# Altium PCB MB1137.PcbDoc (part 1 of 4)
Units mm, origin at the board's own origin, x right, y up, seen from the top; angles counter-clockwise.
Board outline 70.13 x 133.47 mm, 6 copper layers (Top Layer, GND, Signal, PWR, GND (Mid2), Bottom Layer), stack 1.893 mm thick; 293 components, 281 nets, 1134 pads, 921 vias.
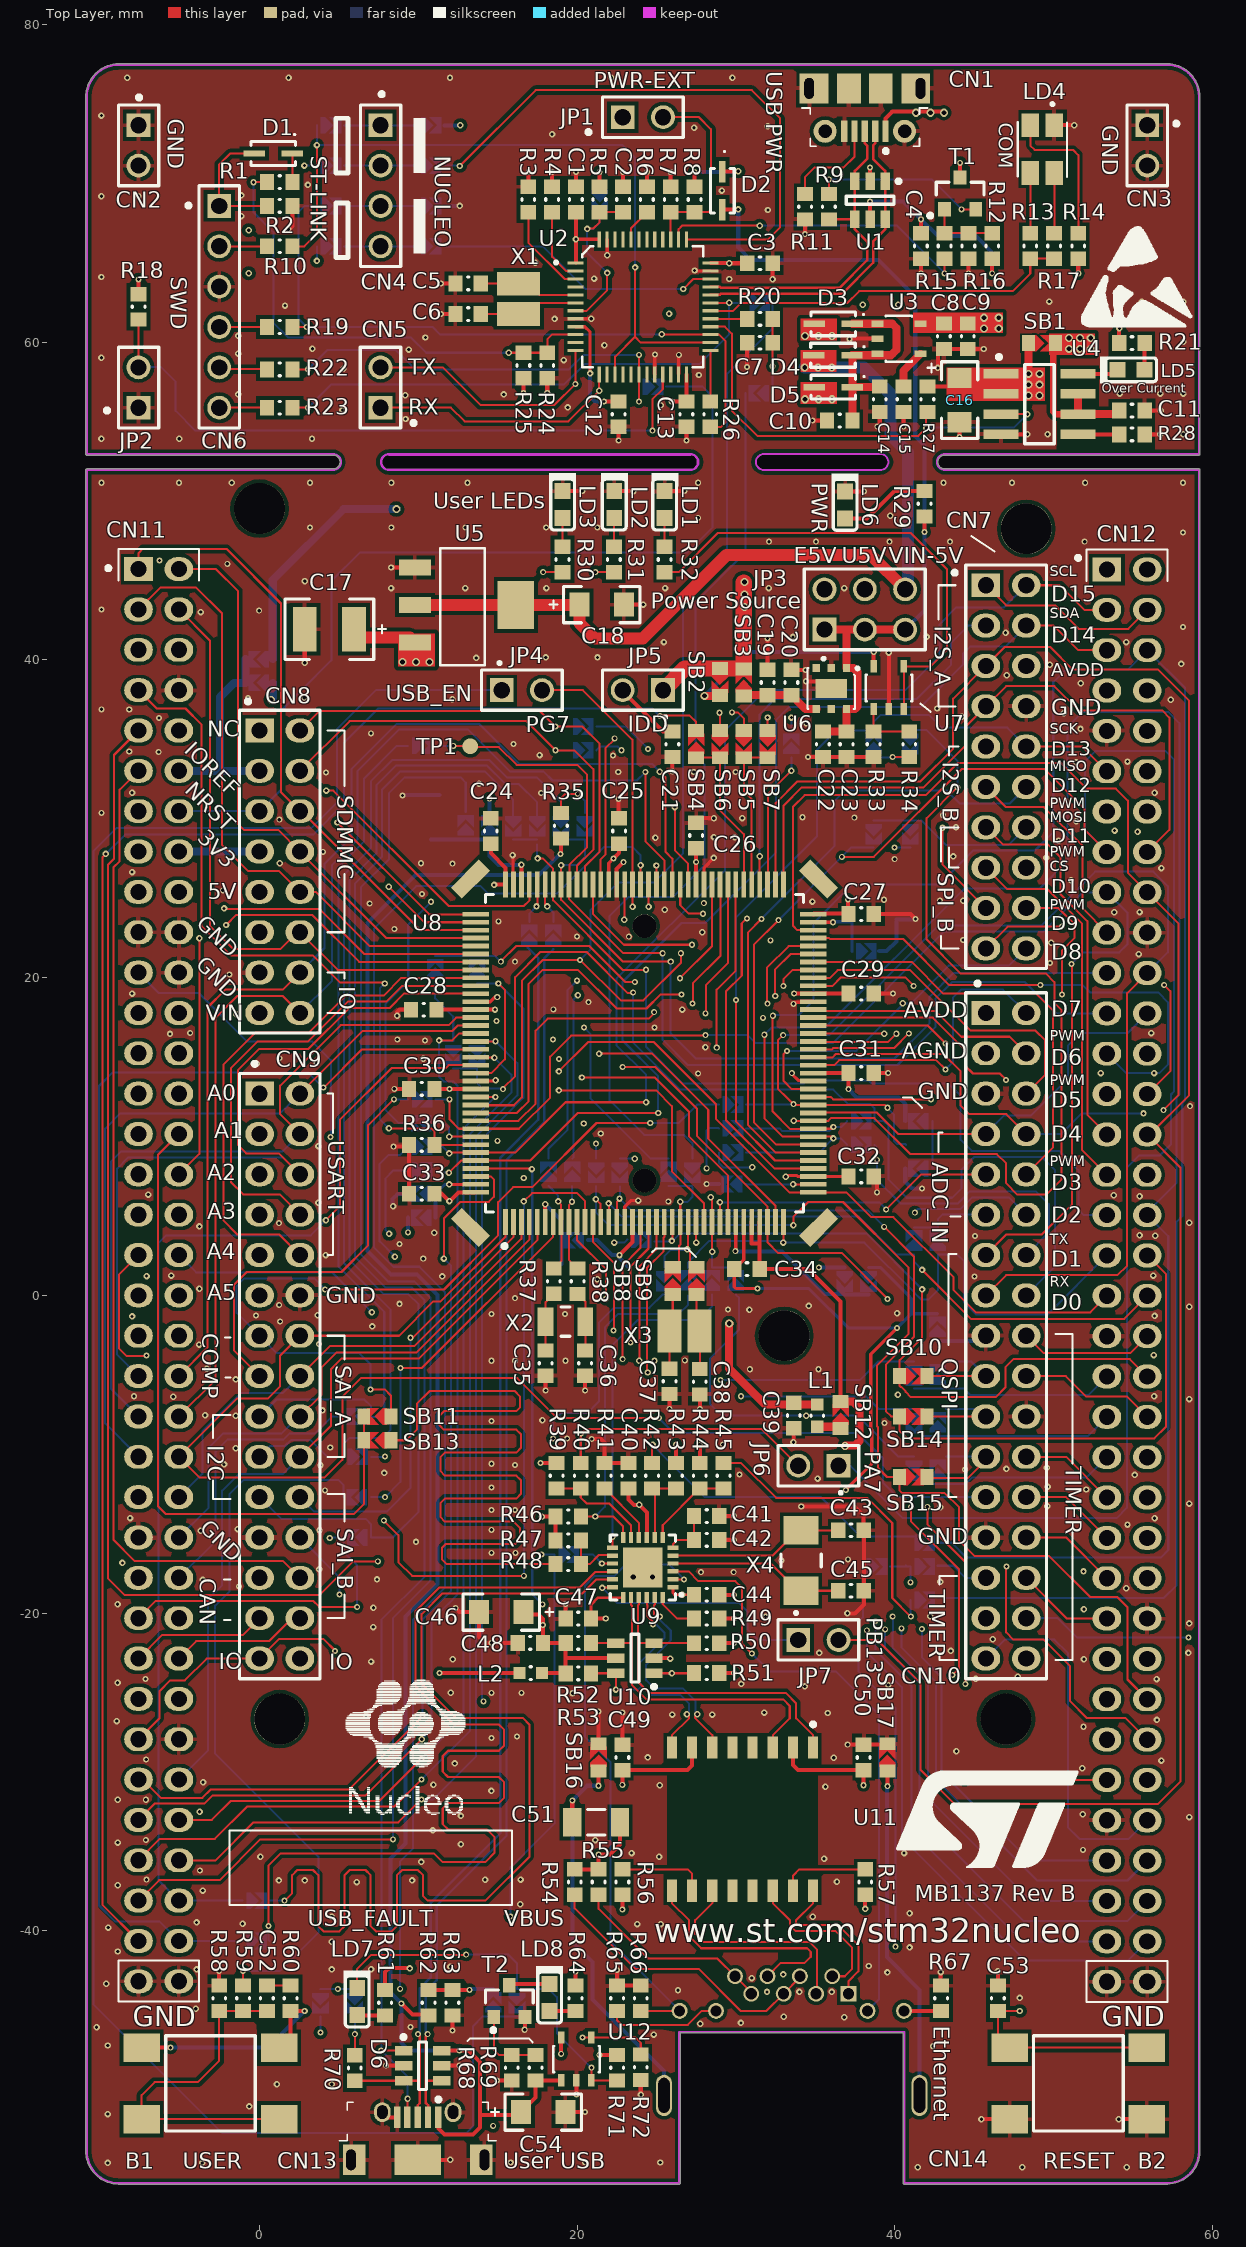
[diagram p0: Top Layer view]
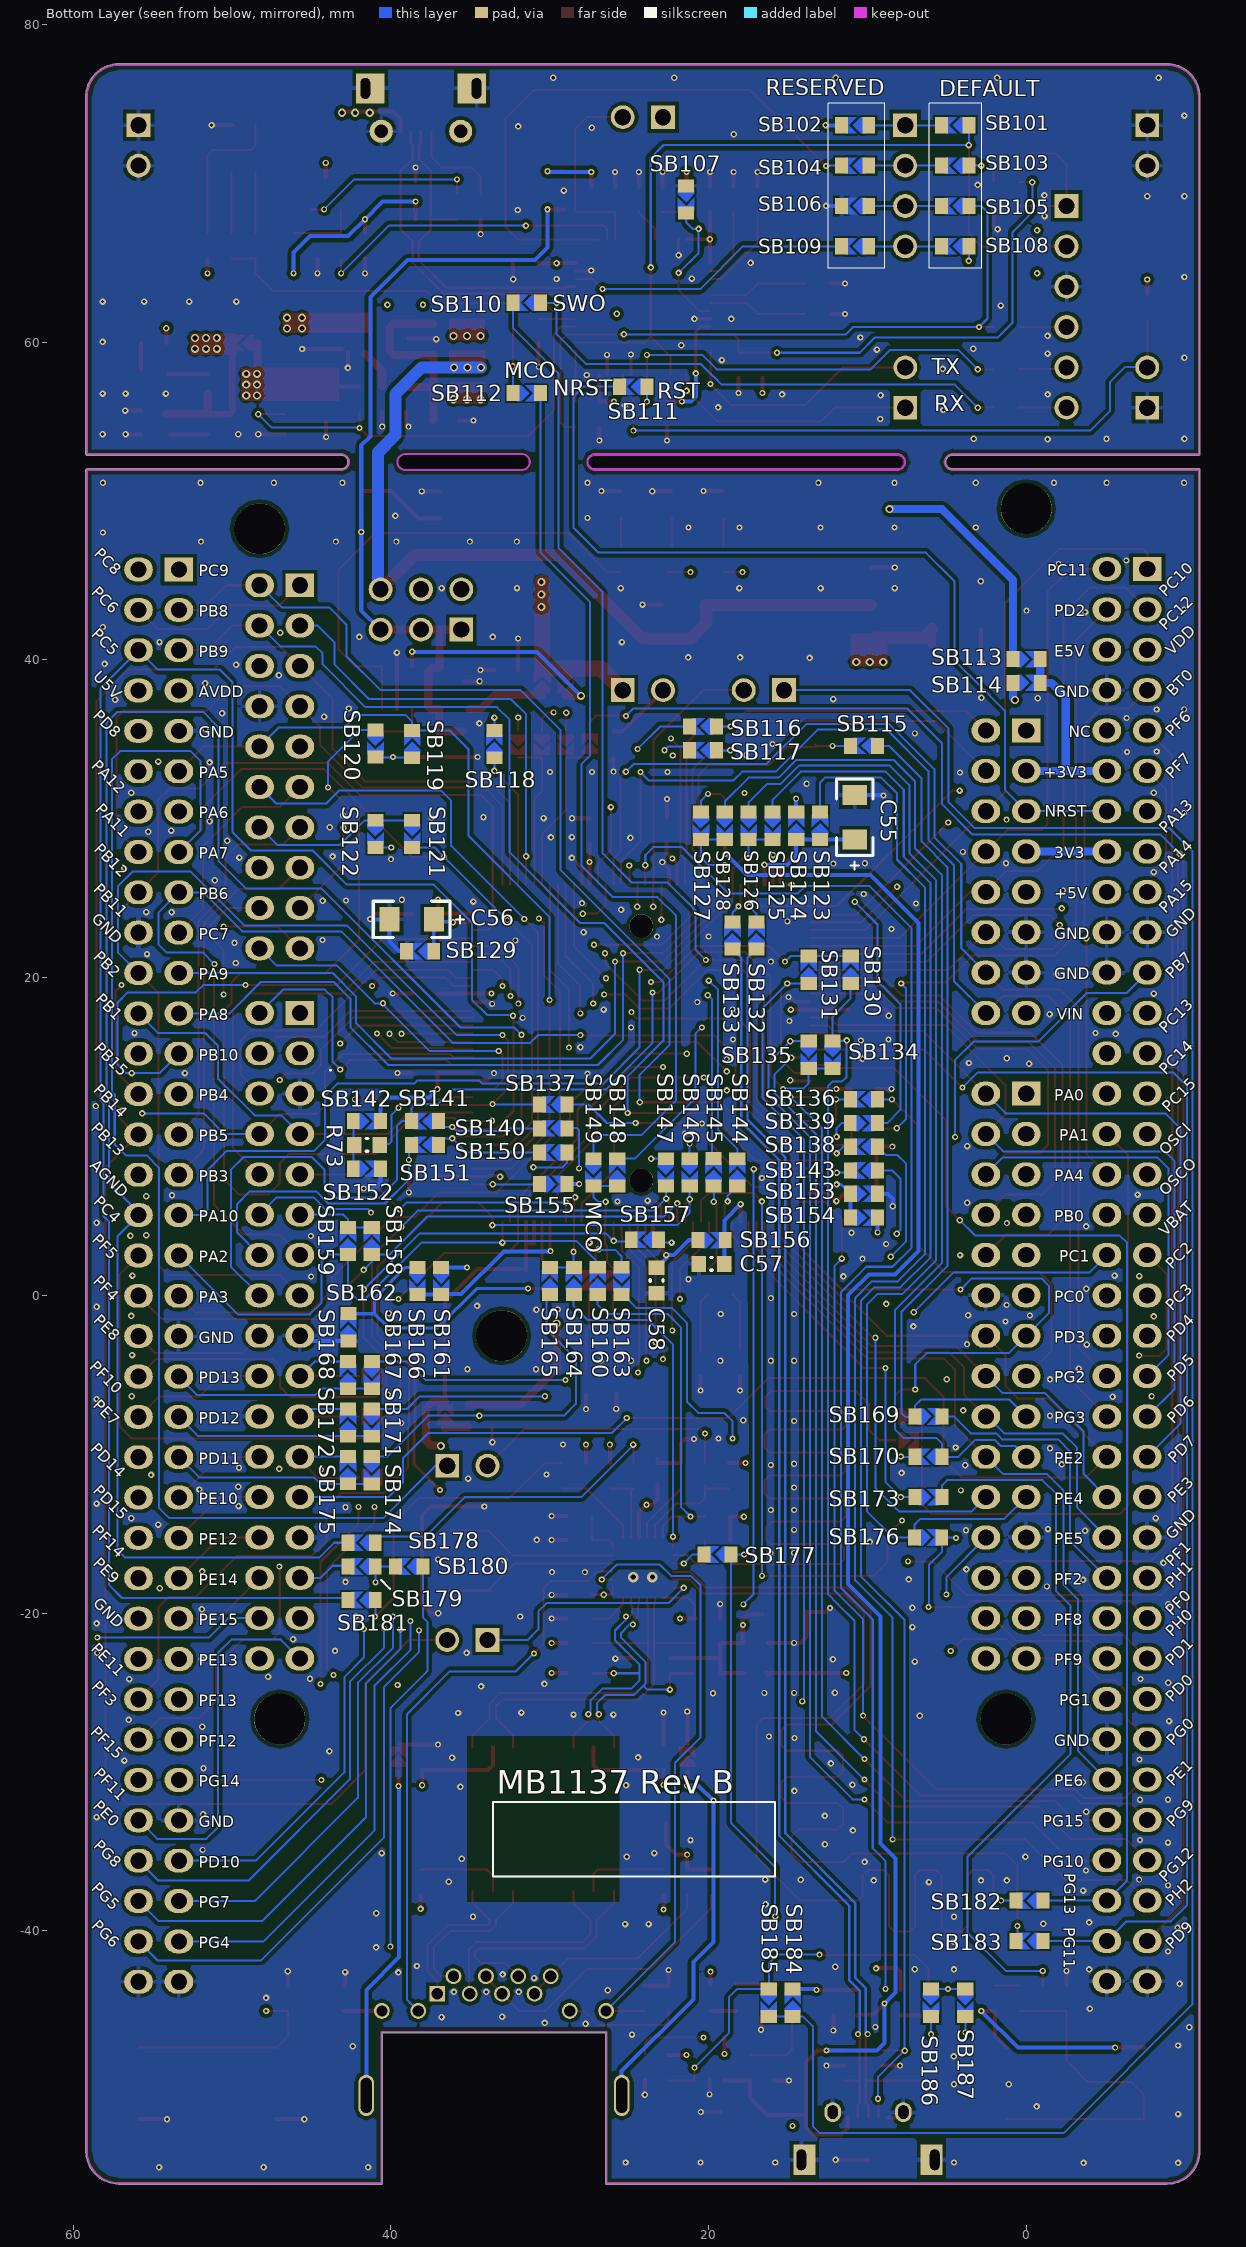
[diagram p1: Bottom Layer view, seen from below]
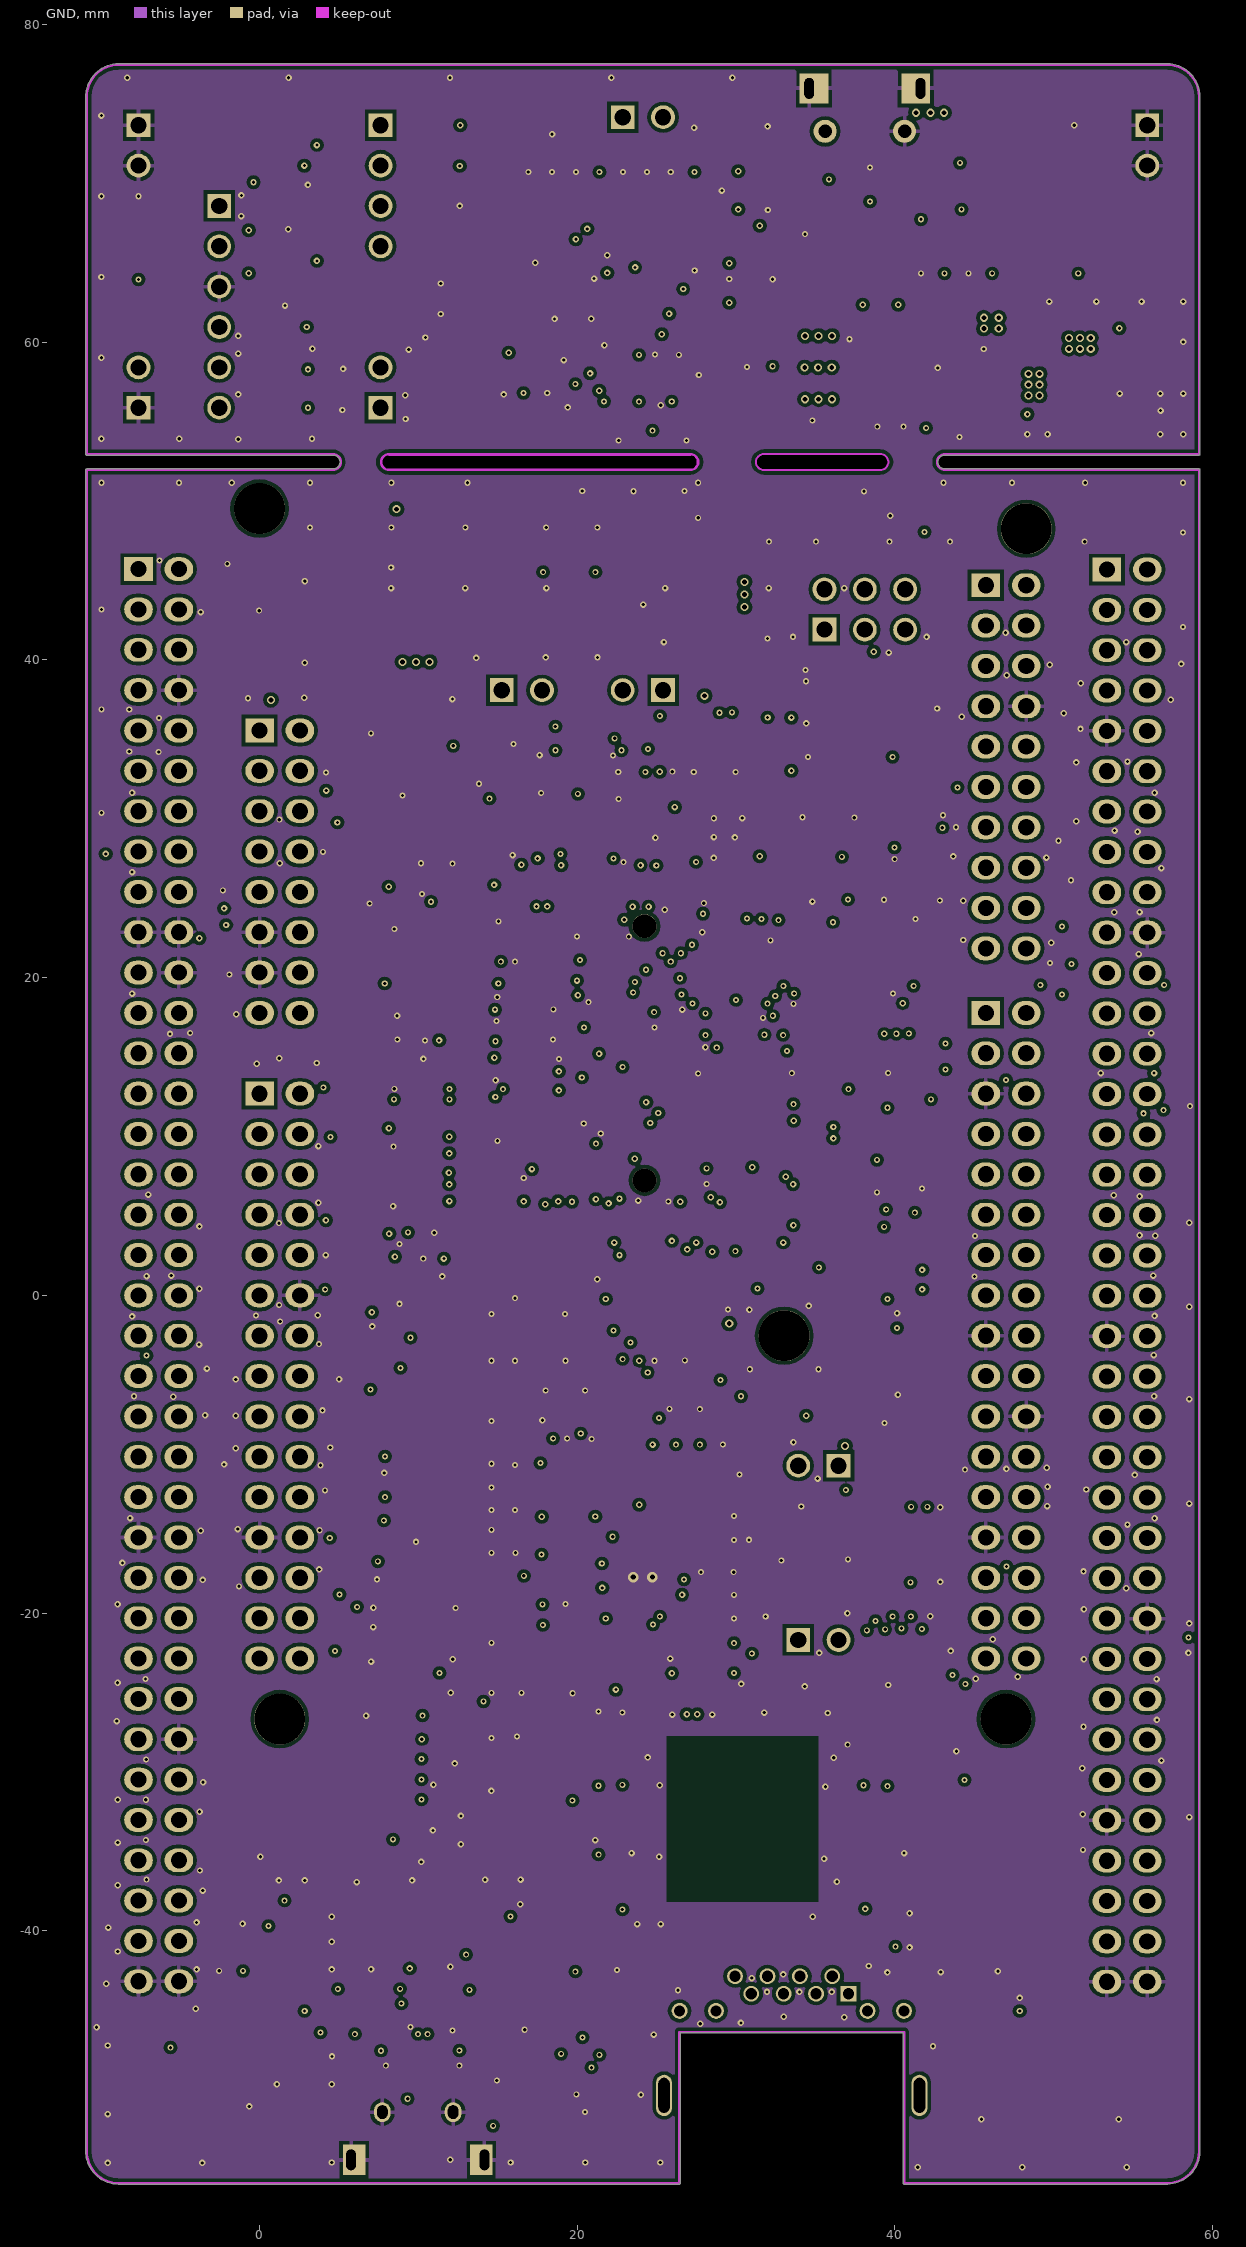
[diagram p2: GND]
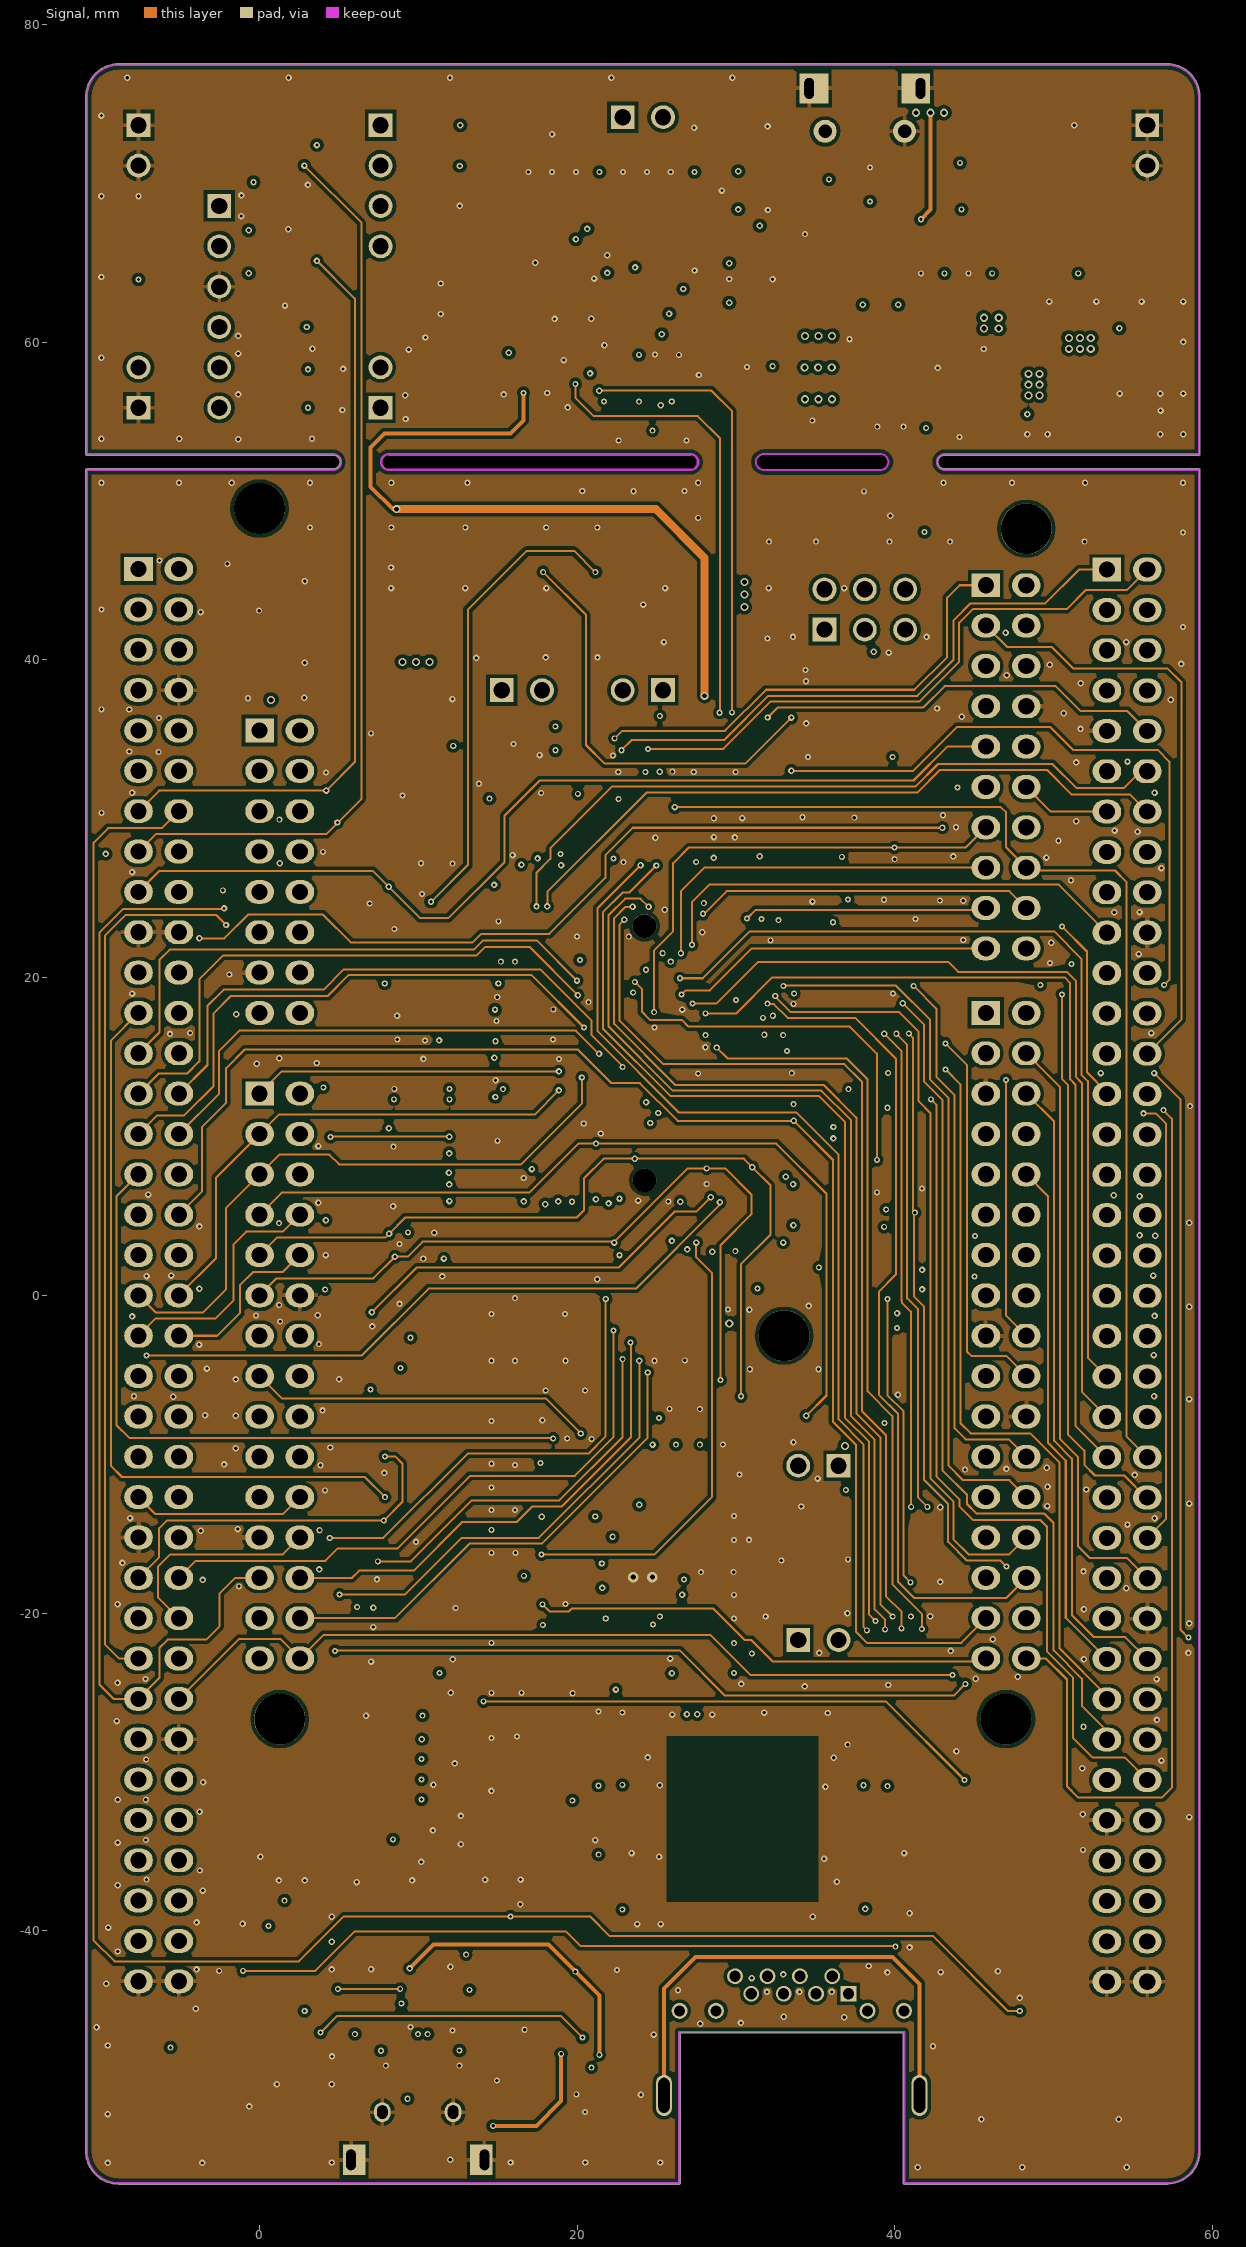
[diagram p3: Signal]
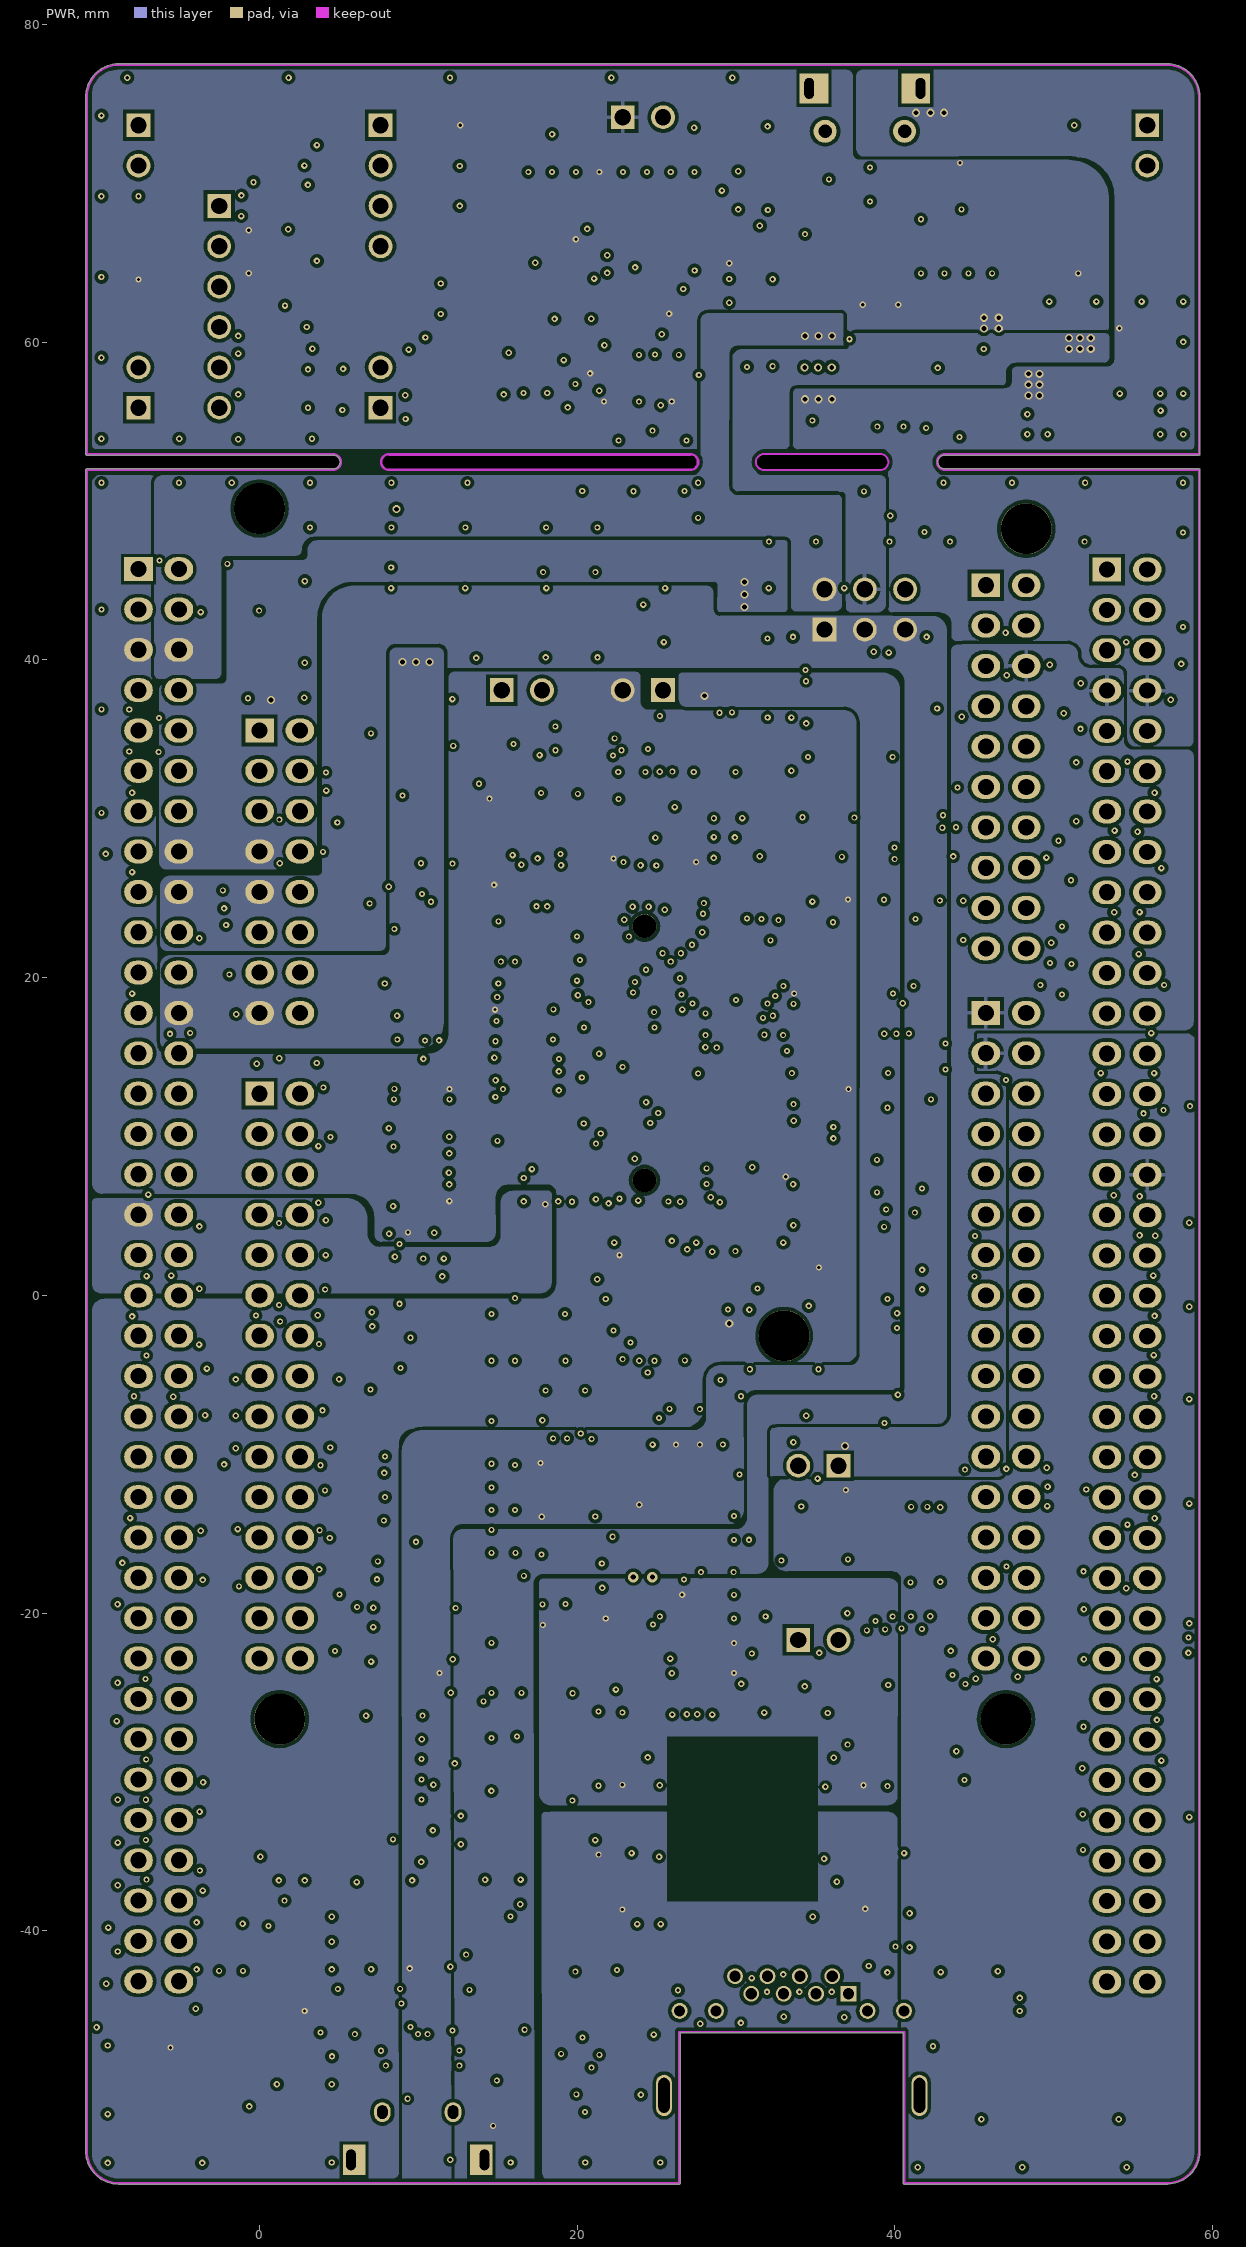
[diagram p4: PWR]
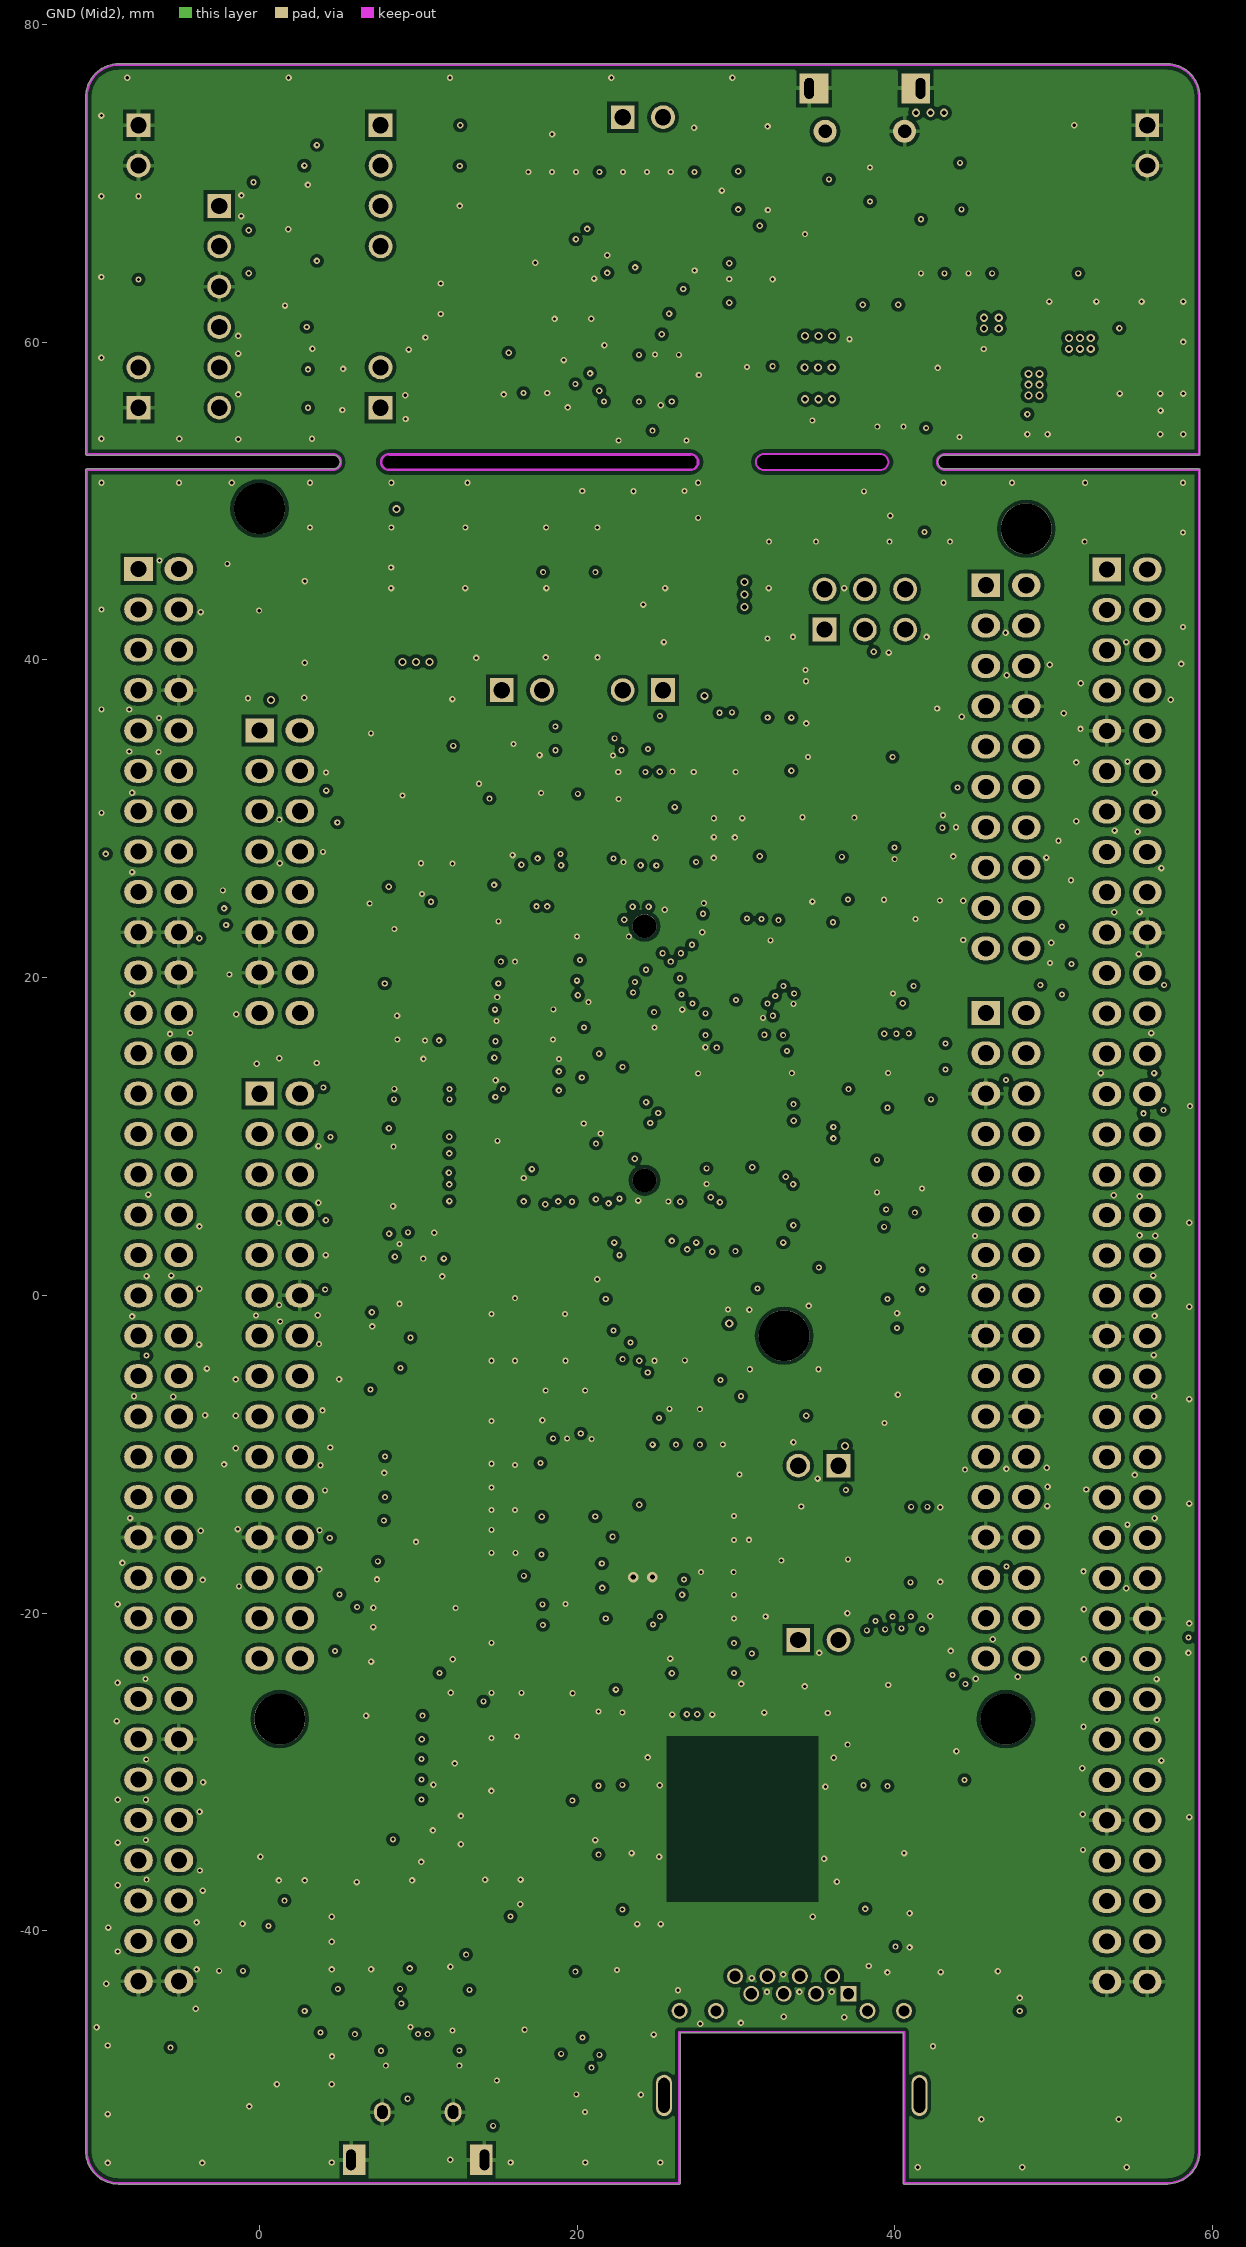
[diagram p5: GND (Mid2)]

## Layer stack, top to bottom
Top Solder: solder mask 0.0102, Solder Resist, Dk 3.5
Top Layer: signal copper 0.0356
Dielectric1: core 0.4, FR-4, Dk 4.8
GND: signal copper 0.0356
Dielectric2: prepreg 0.24, FR-4, Dk 4.8
Signal: signal copper 0.0356
Dielectric4: core 0.32, FR-4, Dk 4.8
PWR: signal copper 0.0356
Dielectric5: prepreg 0.32, FR-4, Dk 4.8
GND (Mid2): signal copper 0.0356
Dielectric3: core 0.4, FR-4, Dk 4.8
Bottom Layer: signal copper 0.0356
Bottom Solder: solder mask 0.0102, Solder Resist, Dk 3.5

## Board outline
-10.934,-53.88 ccw(c-8.87,-53.88) -8.886,-55.944 ccw(c-8.874,-55.881) -8.874,-55.945 26.416,-55.945 ccw(c26.416,-55.881) 26.48,-55.881 26.48,-46.423 40.525,-46.423 40.525,-55.881 ccw(c40.589,-55.881) 40.589,-55.945 57.126,-55.945 ccw(c57.126,-55.881) 57.152,-55.94 ccw(c57.126,-53.876) 59.19,-53.902 ccw(c59.13,-53.88) 59.194,-53.88 59.194,51.96 ccw(c59.13,51.96) 59.13,52.024 43.13,52.024 cw(c43.13,51.96) 43.131,52.024 43.13,52.024 cw(c43.13,52.46) 43.13,52.896 59.129,52.896 ccw(c59.13,52.96) 59.194,52.96 59.194,75.46 ccw(c59.13,75.46) 59.194,75.461 cw(c57.13,75.46) 59.194,75.46 59.194,75.461 ccw(c57.13,75.46) 57.131,77.524 ccw(c57.13,75.46) 57.13,77.524 cw(c57.13,77.46) 57.131,77.524 57.13,77.524 -8.87,77.524 ccw(c-8.87,77.46) -8.871,77.524 cw(c-8.87,75.46) -8.87,77.524 -8.871,77.524 ccw(c-8.87,75.46) -10.934,75.46 -10.934,52.96 ccw(c-10.87,52.96) -10.87,52.896 4.63,52.896 cw(c4.63,52.96) 4.629,52.896 4.63,52.896 cw(c4.63,52.46) 5.066,52.46 cw(c4.63,52.46) 4.63,52.024 -10.87,52.024 ccw(c-10.87,51.96) -10.934,51.96
cut-out: 8.13,52.024 8.131,52.024 14.463,52.024 27.13,52.024 cw(c27.13,51.96) 27.131,52.024 ccw(c27.13,52.46) 27.566,52.46 ccw(c27.13,52.46) 27.13,52.896 cw(c27.13,52.96) 27.129,52.896 27.13,52.896 14.463,52.896 27.129,52.896 14.463,52.896 8.13,52.896 ccw(c8.13,52.96) 8.131,52.896 8.13,52.896 14.463,52.896 8.13,52.896 ccw(c8.13,52.46)
cut-out: 31.75,51.96 cw(c31.75,52.46) 31.75,52.96 39.08,52.96 cw(c39.08,52.46) 39.08,51.96

## Design rules (kind name [scope] priority, off if disabled: settings)
Clearance "U9 PWR TRACK" [(ObjectKind = 'Track') vs (ObjectKind = 'Pad') And (Component = 'U9')] p1: gap=0.203 ignorepadtopadclearanceinfootprint=FALSE
Clearance "U8 PWR TRACK" [(ObjectKind = 'Track') vs (ObjectKind = 'Pad') And (Component = 'U8')] p2: gap=0.203 ignorepadtopadclearanceinfootprint=FALSE
Clearance SB [(HasFootprint('SB_0603')) or (HasFootprint('JP2_SMD'))] p3: gap=0.127 ignorepadtopadclearanceinfootprint=FALSE
Clearance CN1_PAD [(ObjectKind = 'Pad') And (Component = 'CN1') vs (ObjectKind = 'Pad') And (Component = 'CN1')] p4: gap=0.203 ignorepadtopadclearanceinfootprint=FALSE
Clearance U6_PAD [(ObjectKind = 'Pad') And (Component = 'D6') vs (ObjectKind = 'Pad') And (Component = 'D6')] p5: gap=0.203 ignorepadtopadclearanceinfootprint=FALSE
Clearance CN13_PAD [(ObjectKind = 'Pad') And (Component = 'CN13') vs (ObjectKind = 'Pad') And (Component = 'CN13')] p6: gap=0.178 ignorepadtopadclearanceinfootprint=FALSE
Clearance U9_PAD [(ObjectKind = 'Pad') And (Component = 'U9') vs (ObjectKind = 'Pad') And (Component = 'U9')] p7: gap=0.203 ignorepadtopadclearanceinfootprint=FALSE
Clearance U8_PAD [(ObjectKind = 'Pad') And (Component = 'U8') vs (ObjectKind = 'Pad') And (Component = 'U8')] p8: gap=0.198 ignorepadtopadclearanceinfootprint=FALSE
Clearance Polygon [(ObjectKind = 'Poly')] p9: gap=0.254 ignorepadtopadclearanceinfootprint=FALSE
Clearance [All] p10: gap=0.226 ignorepadtopadclearanceinfootprint=FALSE
DiffPairsRouting [All] p1: maxlimit=0.254 minlimit=0.226 mostfreqgap=0.226 toplayer_minwidth=0.381 toplayer_maxwidth=0.381 toplayer_prefwidth=0.381 midlayer1_minwidth=0.381 midlayer1_maxwidth=0.381 midlayer1_prefwidth=0.381 midlayer2_minwidth=0.381 midlayer2_maxwidth=0.381 midlayer2_prefwidth=0.381 midlayer3_minwidth=0.381 midlayer3_maxwidth=0.381 midlayer3_prefwidth=0.381 midlayer4_minwidth=0.381 midlayer4_maxwidth=0.381 midlayer4_prefwidth=0.381 bottomlayer_minwidth=0.381 bottomlayer_maxwidth=0.381 bottomlayer_prefwidth=0.381 maxuncoupledlength=12.7
FabricationTestPointUsage TestPointUsage [All] p1: valid=0 allowmultiple=FALSE
FabricationTestpoint Testpoint [(IsPad And (OnTopLayer Or OnBottomLayer))] p1: side=3 testpointundercomponent=TRUE minsize=1.016 maxsize=2.54 preferedsize=1.524 minholesize=0 maxholesize=1.016 preferedholesize=0.813 testpointgrid=0.025 allowsidetop=TRUE allowsidebottom=TRUE usegrid=TRUE gridtolerance=0
HoleSize [All] p1: absolutevalues=TRUE maxlimit=3.81 minlimit=0.025 maxpercent=80.000 minpercent=20.000
MatchedLengths "Schematic Matched Net Lengths_3" [InNet('TD_P')] p1: tolerance=2.54 checknetsindiffpair=TRUE checkdiffpairvsdiffpair=FALSE checkxsignals=FALSE checkothers=FALSE
MatchedLengths "Schematic Matched Net Lengths_2" [InNet('TD_N')] p2: tolerance=2.54 checknetsindiffpair=TRUE checkdiffpairvsdiffpair=FALSE checkxsignals=FALSE checkothers=FALSE
MatchedLengths "Schematic Matched Net Lengths_1" [InNet('RD_P')] p3: tolerance=2.54 checknetsindiffpair=TRUE checkdiffpairvsdiffpair=FALSE checkxsignals=FALSE checkothers=FALSE
MatchedLengths "Schematic Matched Net Lengths" [InNet('RD_N')] p4: tolerance=2.54 checknetsindiffpair=TRUE checkdiffpairvsdiffpair=FALSE checkxsignals=FALSE checkothers=FALSE
MinimumSolderMaskSliver [All] p1: minsoldermaskwidth=0.013
PolygonConnect VBAT [(ObjectKind = 'Poly') And (Net = 'VBAT')] p1: connectstyle=Direct reliefconductorwidth=0.254 reliefentries=4 polygonreliefangle="90 Angle" airgapwidth=0.254
PolygonConnect VDD [(ObjectKind = 'Poly') And (Net = 'VDD')] p2: connectstyle=Direct reliefconductorwidth=0.254 reliefentries=4 polygonreliefangle="90 Angle" airgapwidth=0.254
PolygonConnect VIN [(ObjectKind = 'Poly') And (Net = 'VIN')] p3: connectstyle=Direct reliefconductorwidth=0.254 reliefentries=4 polygonreliefangle="90 Angle" airgapwidth=0.254
PolygonConnect +3V3 [(ObjectKind = 'Poly') And (Net = '+3V3')] p4: connectstyle=Direct reliefconductorwidth=0.254 reliefentries=4 polygonreliefangle="90 Angle" airgapwidth=0.254
PolygonConnect E5V [(ObjectKind = 'Poly') And (Net = 'E5V')] p5: connectstyle=Direct reliefconductorwidth=0.254 reliefentries=4 polygonreliefangle="90 Angle" airgapwidth=0.254
PolygonConnect +5V [(ObjectKind = 'Poly') And (Net = '+5V')] p6: connectstyle=Direct reliefconductorwidth=0.254 reliefentries=4 polygonreliefangle="90 Angle" airgapwidth=0.254
PolygonConnect U5V [(ObjectKind = 'Poly') And (Net = 'NetC17_2')] p7: connectstyle=Direct reliefconductorwidth=0.254 reliefentries=4 polygonreliefangle="90 Angle" airgapwidth=0.254
PolygonConnect VIA [IsVia] p8: connectstyle=Direct reliefconductorwidth=0.508 reliefentries=4 polygonreliefangle="90 Angle" airgapwidth=0.254
PolygonConnect [All] p9: connectstyle=Relief reliefconductorwidth=0.254 reliefentries=4 polygonreliefangle="90 Angle" airgapwidth=0.254
RoutingLayers [All] p1: top layer_v5=FALSE mid layer 1_v5=FALSE mid layer 2_v5=FALSE mid layer 3_v5=FALSE mid layer 4_v5=FALSE bottom layer_v5=FALSE
RoutingVias [All] p1: holewidth=0.305 width=0.508 viastyle="Through Hole" minholewidth=0.203 minwidth=0.381 maxholewidth=0.711 maxwidth=1.27
SilkToSilkClearance [All] p1: silktosilkclearance=0.102
SilkToSolderMaskClearance SilkscreenOverComponentPads [IsPad] p1: minsilkscreentomaskgap=0.102 clearancetoexposedcopper=TRUE
SolderMaskExpansion [All] p1: expansion=0.102 istentingtop=FALSE
Width PWR [InNetClass('PWR')] p1: maxlimit=2.54 minlimit=0.203 preferedwidth=0.254 midlayer1_minwidth=0.254 midlayer2_minwidth=0.254 midlayer3_minwidth=0.254 midlayer4_minwidth=0.254 bottomlayer_minwidth=0.254 minimp=50.000000 maximp=50.000000 favimp=50.000000
Width [All] p2: maxlimit=2.54 minlimit=0.127 preferedwidth=0.127 minimp=50.000000 maximp=50.000000 favimp=50.000000
22 further rules are at their usual default settings.

## Classes and differential pairs
component class U_USB: C54 CN13 D6 LD7 LD8 R61 R62 R63 R64 R68 R69 R70 R71 R72 R76 SB184 SB185 SB186 SB187 T2 U12
component class U_Ethernet: C40 C41 C42 C43 C44 C45 C46 C47 C48 C49 C50 C51 CN14 L2 R39 R40 R41 R42 R43 R44 R45 R46 R47 R48 R49 R50 R51 R52 R53 R54 R55 R56 R57 R65 R66 R67 SB16 SB17 SB177 U9 U10 U11 X4
component class U_MCU_144: B1 B2 C21 C24 C25 C26 C27 C28 C29 C30 C31 C32 C33 C34 C35 C36 C37 C38 C39 C52 C53 C55 C56 C57 C58 JP4 JP6 JP7 L1 LD2 LD3 R30 R31 R35 R36 R37 R38 R58 R59 R60 R73 SB5 SB6 SB8 SB9 SB12 SB13 SB118 SB123 SB124 SB125 SB127 SB129 SB132 SB133 SB139 SB142 SB149 SB152 SB153 SB154 SB155 SB156 SB160 SB161 SB162 SB164 SB166 SB173 SB178 SB180 SB181 SB182 SB183 TP1 U8 X2 X3
component class MB1137: C11 C16 C17 C18 C19 C20 C22 C23 JP3 JP5 LD5 LD6 R21 R27 R28 R29 SB1 SB2 SB3 U4 U5 U6
net class PH[0..2]: PH0 PH1 PH2
net class PG[0..15]: PG0 PG1 PG2 PG3 PG4 PG5 PG6 PG7 PG8 PG9 PG10 PG11 PG12 PG13 PG14 PG15
net class PF[0..15]: PF0 PF1 PF2 PF3 PF4 PF5 PF6 PF7 PF8 PF9 PF10 PF11 PF12 PF13 PF14 PF15
net class PE[0..15]: PE0 PE1 PE2 PE3 PE4 PE5 PE6 PE7 PE8 PE9 PE10 PE11 PE12 PE13 PE14 PE15
net class PD[0..15]: PD0 PD1 PD2 PD3 PD4 PD5 PD6 PD7 PD8 PD9 PD10 PD11 PD12 PD13 PD14 PD15
net class PA[0..15]: PA0 PA1 PA2 PA3 PA4 PA5 PA6 PA7 PA8 PA9 PA10 PA11 PA12 PA13 PA14 PA15
net class PB[0..15]: PB0 PB1 PB2 PB3 PB4 PB5 PB6 PB7 PB8 PB9 PB10 PB11 PB12 PB13 PB14 PB15
net class PC[0..15]: PC0 PC1 PC2 PC3 PC4 PC5 PC6 PC7 PC8 PC9 PC10 PC11 PC12 PC13 PC14 PC15
component class U_ST_LINK_V2-1: C1 C2 C3 C4 C5 C6 C7 C8 C9 C10 C12 C13 C14 C15 CN1 CN2 CN3 CN4 CN5 CN6 D1 D2 D3 D4 D5 JP1 JP2 LD4 R1 R2 R3 R4 R5 R6 R7 R8 R9 R10 R11 R12 R13 R14 R15 R16 R17 R18 R19 R20 R22 R23 R24 R25 R26 SB101 SB102 SB103 SB104 SB105 SB106 SB107 SB108 SB109 SB110 SB111 SB112 T1 U1 U2 U3 X1
component class U_Connectors: CN7 CN8 CN9 CN10 CN11 CN12 LD1 R32 R33 R34 SB4 SB7 SB10 SB11 SB14 SB15 SB113 SB114 SB115 SB116 SB117 SB119 SB120 SB121 SB122 SB126 SB128 SB130 SB131 SB134 SB135 SB136 SB137 SB138 SB140 SB141 SB143 SB144 SB145 SB146 SB147 SB148 SB150 SB151 SB157 SB158 SB159 SB163 SB165 SB167 SB168 SB169 SB170 SB171 SB172 SB174 SB175 SB176 SB179 U7
differential pair TD: +TD_P -TD_N
differential pair RD: +RD_P -RD_N
differential pair NewDifferentialPair1: +NetCN13_3 -NetCN12_2
differential pair NewDifferentialPair2: +NetCN13_2 -NetCN13_3

## Components (designator, comment, footprint, x,y, rotation, side; value= is the part's Value field where it differs from the comment)
B1 "USER (Blue)" PB-6X6mm-Blue -3.099,-49.606 r180 top
B2 "TD-0341 [RESET/Black]" PB-6X6mm-Black 51.537,-49.606 r180 top
C1 "100nF" 0603C 19.914,68.986 r270 top
C2 "100nF" 0603C 22.885,68.986 r270 top
C3 "100nF" 0603C 31.496,64.973 r180 top
C4 "100nF" 0603C 41.631,66.065 r90 top
C5 "10pF" 0603C 13.132,63.703 r180 top
C6 "10pF" 0603C 13.132,61.773 r180 top
C7 "20pF[N/A]" 0603C 31.496,59.969 r180 top
C8 "100nF" 0603C 43.078,60.376 r90 top locked
C9 "1uF_X5R_0603" 0603C 44.577,60.376 r270 top
C10 "100nF" 0603C 36.525,55.067 r0 top
C11 "100nF" 0603C 54.915,55.702 r180 top
C12 "100nF" 0603C 22.606,55.474 r90 top
C13 "100nF" 0603C 26.873,55.474 r90 top
C14 "1uF_X5R_0603" 0603C 39.04,56.413 r90 top
C15 "10nF_X7R_0603" 0603C 40.538,56.413 r90 top
C16 "4.7uF" TAN-A 44.069,56.363 r90 top
C17 "10uF(25V)" TAN-B 4.394,41.935 r0 top
C18 "10uF" TAN-A 21.539,43.485 r180 top
C19 "100nF" 0603C 31.979,38.583 r270 top
C20 "1uF_X5R_0603" 0603C 33.477,38.583 r90 top
C21 "4.7uF_X5R_0603" 0603C 25.984,34.696 r270 top
C22 "100nF" 0603C 35.458,34.696 r90 top
C23 "1uF_X5R_0603" 0603C 36.957,34.696 r270 top
C24 "100nF" 0603C 14.554,29.235 r90 top
C25 "100nF" 0603C 22.631,29.235 r90 top
C26 "100nF" 0603C 27.483,28.956 r90 top
C27 "100nF" 0603C 37.871,24.003 r0 top
C28 "100nF" 0603C 10.338,17.983 r180 top
C29 "100nF" 0603C 37.871,18.999 r0 top
C30 "100nF" 0603C 10.211,13.005 r180 top
C31 "100nF" 0603C 37.871,13.995 r0 top
C32 "100nF" 0603C 37.871,7.493 r0 top
C33 "100nF" 0603C 10.211,6.401 r180 top
C34 "100nF" 0603C 30.683,1.651 r180 top
C35 "2pF" 0603C 18.009,-4.267 r270 top
C36 "2pF" 0603C 20.498,-4.267 r270 top
C37 "4.3pF[N/A]" 0603C 25.806,-5.41 r270 top
C38 "4.3pF[N/A]" 0603C 27.711,-5.436 r270 top
C39 "100nF" 0603C 33.63,-7.554 r270 top
C40 "100nF" 0603C 23.216,-11.354 r270 top
C41 "1uF_X5R_0603" 0603C 28.143,-13.894 r0 top
C42 "470pF" 0603C 28.143,-15.392 r180 top
C43 "30pF" 0603C 37.236,-14.783 r0 top
C44 "100nF" 0603C 28.143,-18.847 r180 top
C45 "30pF" 0603C 37.236,-18.593 r0 top
C46 "10uF" TAN-A 15.215,-19.939 r0 top
C47 "100nF" 0603C 20.066,-20.345 r0 top
C48 "100nF" 0603C 17.043,-21.869 r0 top
C49 "100nF" 0603C 22.835,-29.083 r270 top
C50 "100nF" 0603C 38.024,-29.083 r270 top
C51 "TC1206KKX7RDBB102" 1206C 21.184,-33.172 r0 top
C52 "[N/A]" 0603C 0.457,-44.247 r270 top
C53 "100nF" 0603C 46.482,-44.247 r270 top
C54 "4.7uF" TAN-A 17.856,-51.41 r180 top
C55 "2.2uF_X7R" TAN-A 10.795,30.099 r270 bottom
C56 "2.2uF_X7R" TAN-A 38.684,23.673 r180 bottom
C57 "1uF_X5R_0603" 0603C 19.804,1.981 r0 bottom
C58 "100nF" 0603C 23.266,0.94 r270 bottom
CN1 "1050170001" Molex_1050170001 38.1,73.279 r180 top locked
CN2 "" HDR_1x2_2R54_V_M -7.62,73.66 r270 top locked
CN3 "" HDR_1x2_2R54_V_M 55.88,73.66 r270 top locked
CN4 "Header 4" HDR_1x4_2R54_V_M 7.62,73.66 r270 top locked
CN5 "" HDR_1x2_2R54_V_M_S 7.612,55.88 r90 top locked
CN6 "Header 6X1" HDR_1x6_2R54_V_M -2.54,68.58 r270 top locked
CN7 "Header 10X2_Female" HDR_10x2_2R54_V_F 45.72,44.704 r270 top locked
CN8 "Header 8X2_Female" HDR_8x2_2R54_V_F 0,35.56 r270 top locked
CN9 "Header 15X2_Female" HDR_15x2_2R54_V_F 0,12.7 r270 top locked
CN10 "Header 17X2_Female" HDR_17x2_2R54_V_F 45.72,17.78 r270 top locked
CN11 "Header 36X2" HDR_2x36_2R54_V_M -7.62,45.72 r270 top locked
CN12 "Header 36X2" HDR_2x36_2R54_V_M 53.34,45.695 r270 top locked
CN13 "475900001" MOLEX_47590001 9.957,-51.74 r0 top locked
CN14 "KRJ-CB4.2GYZNL" RJ45_KRJ-CB4.2GYZNL 33.503,-46.609 r0 top locked
D1 "BAT60JFILM" SOD-323 0.864,71.882 r0 top
D2 "BAT60JFILM" SOD-323 29.134,69.545 r90 top
D3 "BAT60JFILM" SOD-323 36.119,61.163 r0 top
D4 "BAT60JFILM" SOD-323 36.093,59.182 r0 top
D5 "BAT60JFILM" SOD-323 36.119,57.175 r0 top
D6 "ESDA6V1BC6" SOT23-6L 10.262,-48.489 r0 top
JP1 "" HDR_1x2_2R54_V_M_S 22.86,74.168 r0 top locked
JP2 "" HDR_1x2_2R54_V_M_S -7.62,55.88 r90 top locked
JP3 "Header 3X2" HDR_3x2_2R54_V_M 35.56,41.91 r0 top locked
JP4 "" HDR_1x2_2R54_V_M_S 15.24,38.1 r0 top locked
JP5 "" HDR_1x2_2R54_V_M_S 25.4,38.1 r180 top
JP6 "" HDR_1x2_2R54_V_M_S 36.449,-10.719 r180 top
JP7 "" HDR_1x2_2R54_V_M_S 33.909,-21.692 r0 top
L1 "BEAD" 0603L 35.103,-7.569 r90 top
L2 "BEAD" 0603L 17.069,-23.774 r0 top
LD1 "Green" 0603D-G 25.502,49.784 r270 top
LD2 "Blue" 0603D-B 22.327,49.784 r270 top
LD3 "Red" 0603D-R 19.075,49.784 r270 top
LD4 "LD_BICOLOR_CMS" HSMF-A201 49.276,72.161 r270 top
LD5 "Red" 0603D-R 54.864,58.268 r0 top
LD6 "Green" 0603D-G 36.856,49.767 r270 top
LD7 "Red" 0603D-R 6.147,-44.45 r270 top
LD8 "Green" 0603D-G 18.263,-44.196 r270 top
R1 "100[N/A]" 0603R 1.27,70.079 r180 top
R2 "10K" 0603R 1.27,68.58 r0 top
R3 "10K[N/A]" 0603R 16.916,68.986 r270 top
R4 "10K" 0603R 18.415,68.986 r270 top
R5 "100K" 0603R 21.387,68.986 r90 top
R6 "100K" 0603R 24.384,68.986 r270 top
R7 "4K7" 0603R 25.883,68.986 r90 top
R8 "2K7" 0603R 27.381,68.986 r270 top locked
R9 "1K5" 0603R 35.839,68.529 r90 top
R10 "22" 0603R 1.27,66.04 r0 top
R11 "100K" 0603R 34.341,68.529 r270 top
R12 "10K" 0603R 46.119,66.065 r270 top
R13 "100" 0603R 48.514,66.065 r90 top
R14 "0" 0603R 51.537,66.065 r270 top
R15 "100" 0603R 43.122,66.065 r270 top
R16 "36K" 0603R 44.62,66.065 r90 top
R17 "100" 0603R 50.013,66.065 r90 top
R18 "[N/A]" 0603R -7.62,62.23 r270 top
R19 "22" 0603R 1.27,60.96 r0 top
R20 "100" 0603R 31.496,61.468 r0 top
R21 "1K" 0603R 54.915,59.944 r0 top
R22 "22" 0603R 1.27,58.293 r0 top
R23 "22" 0603R 1.27,55.88 r0 top
R24 "4K7" 0603R 18.11,58.539 r90 top
R25 "4K7" 0603R 16.612,58.539 r90 top
R26 "100" 0603R 28.372,55.474 r270 top
R27 "10K" 0603R 42.037,56.413 r270 top
R28 "2K7" 0603R 54.915,54.204 r180 top
R29 "1K" 0603R 41.859,49.835 r270 top
R30 "1K" 0603R 19.069,46.329 r90 top
R31 "680" 0603R 22.301,46.33 r90 top
R32 "510" 0603R 25.502,46.33 r90 top
R33 "200K" 0603R 38.659,34.696 r270 top
R34 "10K" 0603R 40.894,34.696 r270 top
R35 "10K" 0603R 18.974,29.566 r90 top
R36 "10K" 0603R 10.211,9.474 r180 top
R37 "0" 0603R 18.517,0.895 r90 top
R38 "0" 0603R 20.015,0.889 r90 top
R39 "10K" 0603R 18.694,-11.354 r270 top
R40 "33" 0603R 20.219,-11.354 r90 top
R41 "10K" 0603R 21.717,-11.354 r90 top
R42 "33" 0603R 24.714,-11.354 r90 top
R43 "10K" 0603R 26.213,-11.354 r270 top
R44 "10K" 0603R 27.711,-11.354 r270 top
R45 "33" 0603R 29.21,-11.354 r90 top
R46 "1K5" 0603R 19.431,-13.919 r180 top
R47 "10K" 0603R 19.431,-15.418 r0 top
R48 "33" 0603R 19.431,-16.916 r180 top
R49 "12K1" 0603R 28.143,-20.345 r0 top
R50 "50" 0603R 28.143,-21.895 r0 top
R51 "50" 0603R 28.143,-23.774 r0 top
R52 "50" 0603R 20.066,-21.869 r180 top
R53 "50" 0603R 20.066,-23.8 r180 top
R54 "75" 0603R 19.837,-36.932 r270 top
R55 "75" 0603R 21.344,-36.932 r270 top
R56 "75" 0603R 22.835,-36.932 r90 top
R57 "75" 0603R 38.125,-36.932 r90 top
R58 "220K" 0603R -2.54,-44.247 r90 top
R59 "330" 0603R -1.041,-44.247 r90 top
R60 "100" 0603R 1.956,-44.247 r90 top
R61 "620" 0603R 7.899,-44.526 r90 top
R62 "430K" 0603R 10.643,-44.526 r90 top
R63 "620K" 0603R 12.141,-44.526 r270 top
R64 "330" 0603R 19.888,-44.247 r90 top
R65 "270" 0603R 22.504,-44.247 r90 top
R66 "10K" 0603R 23.995,-44.247 r90 top
R67 "270" 0603R 42.901,-44.247 r90 top
R68 "47K" 0603R 17.374,-48.616 r90 top
R69 "22K" 0603R 15.875,-48.616 r90 top
R70 "1K5" 0603R 5.994,-48.641 r90 top
R71 "47K" 0603R 22.504,-48.616 r270 top
R72 "10K" 0603R 23.995,-48.59 r90 top
R73 "100K" 0603R 41.504,9.474 r0 bottom
SB1 "Open" SB_0603 49.251,59.944 r180 top
SB2 "Closed" SB_0603 28.981,38.608 r90 top locked
SB3 "Closed" SB_0603 30.48,38.583 r270 top
SB4 "Closed" SB_0603 27.483,34.703 r270 top
SB5 "Closed" SB_0603 30.48,34.703 r90 top
SB6 "Closed" SB_0603 28.981,34.703 r90 top
SB7 "Closed" SB_0603 31.979,34.703 r90 top
SB8 "Open" SB_0603 26.01,0.914 r270 top locked
SB9 "Open" SB_0603 27.508,0.914 r270 top locked
SB10 "Circuit Breaker" SB_0603 41.148,-5.08 r180 top
SB11 "Circuit Breaker" SB_0603 7.417,-7.619 r0 top
SB12 "Closed" SB_0603 36.576,-7.532 r270 top
SB13 "Closed" SB_0603 7.417,-9.119 r0 top
SB14 "Circuit Breaker" SB_0603 41.148,-7.62 r180 top
SB15 "Circuit Breaker" SB_0603 41.148,-11.43 r180 top
SB16 "Open" SB_0603 21.336,-29.083 r270 top
SB17 "Open" SB_0603 39.522,-29.083 r270 top
SB101 "Closed" SB_0603 4.47,73.66 r180 bottom
SB102 "Open" SB_0603 10.77,73.66 r180 bottom
SB103 "Closed" SB_0603 4.47,71.12 r180 bottom
SB104 "Open" SB_0603 10.77,71.12 r180 bottom
SB105 "Closed" SB_0603 4.47,68.58 r180 bottom
SB106 "Open" SB_0603 10.77,68.58 r180 bottom
SB107 "Open" SB_0603 21.412,68.986 r90 bottom
SB108 "Closed" SB_0603 4.47,66.04 r180 bottom
SB109 "Open" SB_0603 10.77,66.04 r180 bottom
SB110 "Closed" SB_0603 31.445,62.484 r180 bottom
SB111 "Closed" SB_0603 24.74,57.201 r180 bottom
SB112 "Closed" SB_0603 31.445,56.794 r0 bottom
SB113 "Open" SB_0603 -0.025,40.056 r0 bottom locked
SB114 "Closed" SB_0603 -0.025,38.557 r0 bottom locked
SB115 "Circuit Breaker" SB_0603 10.211,34.595 r180 bottom
SB116 "Closed" SB_0603 20.345,35.814 r180 bottom
SB117 "Closed" SB_0603 20.345,34.315 r180 bottom
SB118 "Closed" SB_0603 33.477,34.703 r270 bottom
SB119 "Open" SB_0603 38.659,34.703 r270 bottom locked
SB120 "Closed" SB_0603 40.964,34.747 r90 bottom
SB121 "Closed" SB_0603 38.659,29.051 r90 bottom
SB122 "Open" SB_0603 40.964,29.051 r90 bottom
SB123 "Circuit Breaker" SB_0603 12.979,29.566 r270 bottom
SB124 "Circuit Breaker" SB_0603 14.478,29.566 r270 bottom
SB125 "Circuit Breaker" SB_0603 15.962,29.566 r90 bottom
SB126 "Circuit Breaker" SB_0603 17.475,29.566 r90 bottom
SB127 "Circuit Breaker" SB_0603 20.472,29.566 r90 bottom
SB128 "Circuit Breaker" SB_0603 18.974,29.566 r90 bottom
SB129 "Circuit Breaker" SB_0603 38.151,21.666 r180 bottom
SB130 "Circuit Breaker" SB_0603 11.049,20.498 r270 bottom
SB131 "Circuit Breaker" SB_0603 13.691,20.498 r270 bottom
SB132 "Closed" SB_0603 16.982,22.65 r270 bottom
SB133 "Closed" SB_0603 18.491,22.65 r270 bottom
SB134 "Circuit Breaker" SB_0603 12.192,15.145 r90 bottom
SB135 "Circuit Breaker" SB_0603 13.691,15.145 r90 bottom
SB136 "Circuit Breaker" SB_0603 10.211,12.344 r180 bottom
SB137 "Circuit Breaker" SB_0603 29.769,12.014 r180 bottom
SB138 "Open" SB_0603 10.211,9.36 r180 bottom
SB139 "Closed" SB_0603 10.217,10.846 r0 bottom
SB140 "Circuit Breaker" SB_0603 29.769,10.516 r180 bottom
SB141 "Circuit Breaker" SB_0603 37.846,10.973 r180 bottom
SB142 "Open" SB_0603 41.504,10.973 r0 bottom locked
SB143 "Open" SB_0603 10.211,7.861 r180 bottom
SB144 "Open" SB_0603 18.186,7.747 r270 bottom
SB145 "Open" SB_0603 19.685,7.753 r270 bottom
SB146 "Circuit Breaker" SB_0603 21.184,7.747 r90 bottom
SB147 "Circuit Breaker" SB_0603 22.682,7.747 r90 bottom
SB148 "Open" SB_0603 25.748,7.747 r270 bottom
SB149 "Closed" SB_0603 27.247,7.747 r90 bottom
SB150 "Circuit Breaker" SB_0603 29.769,8.992 r180 bottom
SB151 "Circuit Breaker" SB_0603 37.846,9.474 r180 bottom
SB152 "Open" SB_0603 41.504,7.976 r0 bottom locked
SB153 "Circuit Breaker" SB_0603 10.209,6.396 r0 bottom
SB154 "Circuit Breaker" SB_0603 10.209,4.898 r0 bottom
SB155 "Closed" SB_0603 29.769,7.01 r0 bottom
SB156 "Closed" SB_0603 19.804,3.48 r0 bottom
SB157 "Circuit Breaker" SB_0603 24.003,3.505 r180 bottom
SB158 "Circuit Breaker" SB_0603 41.199,3.429 r270 bottom
SB159 "Circuit Breaker" SB_0603 42.697,3.429 r270 bottom
SB160 "Closed" SB_0603 26.975,0.914 r270 bottom
SB161 "Circuit Breaker" SB_0603 36.83,0.907 r90 bottom
SB162 "Closed" SB_0603 42.672,-2.007 r270 bottom
SB163 "Closed" SB_0603 25.476,0.914 r90 bottom locked
SB164 "Closed" SB_0603 28.473,0.909 r270 bottom
SB165 "Circuit Breaker" SB_0603 29.986,0.909 r270 bottom
SB166 "Circuit Breaker" SB_0603 38.329,0.907 r90 bottom
SB167 "Circuit Breaker" SB_0603 41.192,-5.016 r90 bottom
SB168 "Circuit Breaker" SB_0603 42.697,-5.016 r270 bottom
SB169 "Circuit Breaker" SB_0603 6.147,-7.62 r0 bottom
SB170 "Circuit Breaker" SB_0603 6.147,-10.16 r180 bottom
SB171 "Circuit Breaker" SB_0603 41.199,-8.007 r90 bottom
SB172 "Circuit Breaker" SB_0603 42.697,-8.007 r270 bottom
SB173 "Closed" SB_0603 6.147,-12.7 r0 bottom
SB174 "Circuit Breaker" SB_0603 41.199,-11.005 r90 bottom
SB175 "Circuit Breaker" SB_0603 42.697,-10.998 r270 bottom
SB176 "Circuit Breaker" SB_0603 6.172,-15.24 r0 bottom
SB177 "Closed" SB_0603 19.431,-16.307 r180 bottom
SB178 "Closed" SB_0603 41.834,-15.57 r180 bottom
SB179 "Closed" SB_0603 41.834,-17.069 r180 bottom
SB180 "Open" SB_0603 38.837,-17.069 r180 bottom
SB181 "Closed" SB_0603 41.834,-19.177 r180 bottom
SB182 "Closed" SB_0603 -0.203,-38.1 r180 bottom
SB183 "Closed" SB_0603 -0.203,-40.64 r180 bottom
SB184 "Closed" SB_0603 14.707,-44.525 r270 bottom
SB185 "Closed" SB_0603 16.205,-44.526 r90 bottom
SB186 "Closed" SB_0603 5.994,-44.525 r90 bottom locked
SB187 "Closed" SB_0603 3.835,-44.525 r90 bottom
T1 "9013" SOT-23 44.094,69.367 r0 top locked
T2 "9013" SOT-23 15.723,-44.425 r0 top
TP1 "USB_SOF" TP 13.259,34.569 r0 top
U1 "USBLC6-2SC6" SOT23-6L 38.43,68.936 r270 top
U2 "STM32F103CBT6" LQFP48_0R5_7x7 24.13,62.23 r270 top locked
U3 "LD3985M33R" SOT-23-5L 40.259,60.223 r0 top locked
U4 "ST890CDR" SOIC8_1R27_4R9X6 49.098,56.109 r0 top locked
U5 "LD1117S50TR" SOT-223 12.954,43.459 r0 top
U6 "LD39050PU33R" DFN6_0R95_3x3_TP 35.992,38.202 r180 top
U7 "TSV631AILT" SOT-23-5L 39.611,38.252 r90 top
U8 "MCU_LQFP144" LQFP144_0R5_SKT 24.232,15.24 r0 top locked
U9 "LAN8742A-CZ-TR" QFN24_0R5_4X4 24.13,-17.128 r180 top
U10 "USBLC6-4SC6" SOT23-6L 23.63,-22.835 r180 top
U11 "KMS-1102NL" Transformer 30.404,-32.969 r180 top locked
U12 "STMPS2151STR" SOT-23-5L 19.939,-48.057 r90 top
X1 "NX3225GD-8.000M-EXS00A-CG04874" OSC_2SM_3R2x2R5 16.307,62.738 r90 top
X2 "NX3215SA-32.768KHZ-EXS00A-MU00525" XTAL_2SM_3R2X1R5 19.253,-1.651 r180 top
X3 "NX3225GD-8.000M-EXS00A-CG04874[N/A]" OSC_2SM_3R2x2R5 26.746,-2.235 r180 top
X4 "X53T-C20SSA-25.000MHz" XTAL_2SM_5R0X3R2 34.087,-16.688 r270 top

## Footprints (in the part's own frame and the unit in brackets; to place one, negate y for a bottom-side part, rotate by r counter-clockwise, add the part's x,y. Pads: shape width x height; smd on the part's side, far side on the other; paste and mask are expansions set on the pad)
0603C [mm] "Chip Capacitor, Body 1.6x0.8mm, Height 1.0mm, IPC Medium Density"
  rect 0.9x1 smd: 1(-0.8,0) 2(0.8,0)
  silkscreen extent -0.05,-0.4 0.05,0.4, body extent -0.87,-0.48 0.88,0.47, height 1
0603D-B [mm] "LED, SMT, Body 1.6 x 0.8 mm, 0.25mm Thickness"
  rect 1x1 smd paste+0 mask+0: 1(0.85,0) 2(-0.85,0)
  silkscreen extent -1.99,-0.85 1.6,0.85, body extent -0.8,-0.4 0.8,0.4, height 0.25
0603D-G [mm] "LED, SMT, Body 1.6 x 0.8 mm, 0.25mm Thickness"
  rect 1x1 smd paste+0 mask+0: 1(0.85,0) 2(-0.85,0)
  silkscreen extent -1.99,-0.84 1.6,0.86, body extent -0.8,-0.4 0.8,0.4, height 0.25
0603D-R [mm] "LED, SMT, Body 1.6 x 0.8 mm, 0.25mm Thickness"
  rect 1x1 smd paste+0 mask+0: 1(0.85,0) 2(-0.85,0)
  silkscreen extent -1.98,-0.86 1.6,0.84, body extent -0.8,-0.4 0.8,0.4, height 0.25
0603L [mil] "Bead 0603L"
  rect 30x30 smd: 1(27.5,0) 2(-27.5,0)
  silkscreen extent -2,-16 2,16, body extent -34,-19 34,19, height 24
0603R [mm] "Chip Resistor, Body 1.6x0.8mm, IPC Medium Density"
  rect 0.9x1 smd: 1(-0.8,0) 2(0.8,0)
  silkscreen extent -0.05,-0.4 0.05,0.4, body extent -0.85,-0.47 0.85,0.47, height 0.6
1206C [mm] "Chip Capacitor, Body 3.2x1.6mm, Height 1mm, IPC Medium Density"
  rect 1.15x1.8 smd: 1(-1.5,0) 2(1.5,0)
  silkscreen extent -0.55,-0.8 0.55,0.8, body extent -1.7,-0.9 1.7,0.9, height 1
DFN6_0R95_3x3_TP [mm] "500 mA low quiescent current and low noise voltage regulator"
  rect 2x1.2 smd: 0(0,0)
  rect 0.45x0.5 smd: 1(-0.95,-1.3) 2(0,-1.3) 3(0.95,-1.3) 4(0.95,1.3) 5(0,1.3) 6(-0.95,1.3)
  silkscreen extent -1.71,-1.33 1.5,1.3, body extent -1.5,-1.5 1.5,1.5, height 1
HDR_1x2_2R54_V_M [mm] "Male Header, Pitch 2.54mm, 4x1 Position, Mated Height 6mm, Tail Length 10mm"
  rect 1.5x1.5 hole 1.02: 1(0,0)
  round 1.5 hole 1.02: 2(2.54,0)
  silkscreen extent -1.88,-1.27 3.81,1.27, body extent -1.27,-1.27 3.81,1.27, height 9
HDR_1x2_2R54_V_M_S [mm] "Male Header, Pitch 2.54mm, 4x1 Position, Mated Height 6mm, Tail Length 3mm"
  rect 1.5x1.5 hole 1.02: 1(0,0)
  round 1.5 hole 1.02: 2(2.54,0)
  silkscreen extent -1.27,-2.21 3.81,1.27, body extent -1.27,-1.27 3.81,1.27, height 9
HDR_1x4_2R54_V_M [mm] "Male Header, Pitch 2.54mm, 4x1 Position, Mated Height 6mm, Tail Length 3mm"
  rect 1.5x1.5 hole 1.02: 1(0,0)
  round 1.5 hole 1.02: 2(2.54,0) 3(5.08,0) 4(7.62,0)
  silkscreen extent -2.08,-1.27 8.89,1.27, body extent -1.27,-1.27 8.89,1.27, height 9
HDR_1x6_2R54_V_M [mm] "Male Header, Pitch 2.54mm, 6x1 Position, Mated Height 6mm, Tail Length 3mm"
  rect 1.5x1.5 hole 1.02: 1(0,0)
  round 1.5 hole 1.02: 2(2.54,0) 3(5.08,0) 4(7.62,0) 5(10.16,0) 6(12.7,0)
  silkscreen extent -1.27,-2.06 13.97,1.27, body extent -1.27,-1.27 13.97,1.27, height 9
HDR_2x36_2R54_V_M [mm] "Male Header, Pitch 2.54mm, 36x2 Position, Mated Height 6mm, Tail Length 3mm"
  rect 1.5x1.8 hole 1.02: 1(0,0)
  oval 1.5x1.8 hole 1.02: 2(0,2.54) 3(2.54,0) 4(2.54,2.54) 5(5.08,0) 6(5.08,2.54) 7(7.62,0) 8(7.62,2.54) 9(10.16,0) 10(10.16,2.54) 11(12.7,0) 12(12.7,2.54) 13(15.24,0) 14(15.24,2.54) 15(17.78,0) 16(17.78,2.54) 17(20.32,0) 18(20.32,2.54) 19(22.86,0) 20(22.86,2.54) 21(25.4,0) 22(25.4,2.54) 23(27.94,0) 24(27.94,2.54) 25(30.48,0) 26(30.48,2.54) 27(33.02,0) 28(33.02,2.54) 29(35.56,0) 30(35.56,2.54) 31(38.1,0) 32(38.1,2.54) 33(40.64,0) 34(40.64,2.54) 35(43.18,0) 36(43.18,2.54) 37(45.72,0) 38(45.72,2.54) 39(48.26,0) 40(48.26,2.54) 41(50.8,0) 42(50.8,2.54) 43(53.34,0) 44(53.34,2.54) 45(55.88,0) 46(55.88,2.54) 47(58.42,0) 48(58.42,2.54) 49(60.96,0) 50(60.96,2.54) 51(63.5,0) 52(63.5,2.54) 53(66.04,0) 54(66.04,2.54) 55(68.58,0) 56(68.58,2.54) 57(71.12,0) 58(71.12,2.54) 59(73.66,0) 60(73.66,2.54) 61(76.2,0) 62(76.2,2.54) 63(78.74,0) 64(78.74,2.54) 65(81.28,0) 66(81.28,2.54) 67(83.82,0) 68(83.82,2.54) 69(86.36,0) 70(86.36,2.54) 71(88.9,0) 72(88.9,2.54)
  silkscreen extent -1.27,-2.03 90.17,3.81, body extent -1.27,-1.27 90.17,3.81, height 9
HDR_3x2_2R54_V_M [mm] "Male Header, Pitch 2.54mm, 2x3 Position, Mated Height 6mm, Tail Length 3mm"
  rect 1.5x1.5 hole 1.02: 1(0,0)
  round 1.5 hole 1.02: 2(0,2.54) 3(2.54,0) 4(2.54,2.54) 5(5.08,0) 6(5.08,2.54)
  silkscreen extent -1.27,-1.89 6.35,3.81, body extent -1.27,-1.27 6.35,3.81, height 9
HDR_8x2_2R54_V_F [mm] "Female Header, Pitch 2.54mm, 2x8 Position, Mated Height 6mm, Tail Length 3mm"
  rect 1.5x1.8 hole 1.02: 1(0,0)
  oval 1.5x1.8 hole 1.02: 2(0,2.54) 3(2.54,0) 4(2.54,2.54) 5(5.08,0) 6(5.08,2.54) 7(7.62,0) 8(7.62,2.54) 9(10.16,0) 10(10.16,2.54) 11(12.7,0) 12(12.7,2.54) 13(15.24,0) 14(15.24,2.54) 15(17.78,0) 16(17.78,2.54)
  silkscreen extent -1.96,-1.27 19.05,3.81, body extent -1.27,-1.27 19.05,3.81, height 8.64
HDR_10x2_2R54_V_F [mm] "Female Header, Pitch 2.54mm, 2x8 Position, Mated Height 6mm, Tail Length 3mm"
  rect 1.5x1.8 hole 1.02: 1(0,0)
  oval 1.5x1.8 hole 1.02: 2(0,2.54) 3(2.54,0) 4(2.54,2.54) 5(5.08,0) 6(5.08,2.54) 7(7.62,0) 8(7.62,2.54) 9(10.16,0) 10(10.16,2.54) 11(12.7,0) 12(12.7,2.54) 13(15.24,0) 14(15.24,2.54) 15(17.78,0) 16(17.78,2.54) 17(20.32,0) 18(20.32,2.54) 19(22.86,0) 20(22.86,2.54)
  silkscreen extent -1.27,-2.09 24.13,3.81, body extent -1.27,-1.27 24.13,3.81, height 8.64
HDR_15x2_2R54_V_F [mm] "Female Header, Pitch 2.54mm, 2x15 Position, Mated Height 6mm, Tail Length 3mm"
  rect 1.5x1.8 hole 1.02: 1(0,0)
  oval 1.5x1.8 hole 1.02: 2(0,2.54) 3(2.54,0) 4(2.54,2.54) 5(5.08,0) 6(5.08,2.54) 7(7.62,0) 8(7.62,2.54) 9(10.16,0) 10(10.16,2.54) 11(12.7,0) 12(12.7,2.54) 13(15.24,0) 14(15.24,2.54) 15(17.78,0) 16(17.78,2.54) 17(20.32,0) 18(20.32,2.54) 19(22.86,0) 20(22.86,2.54) 21(25.4,0) 22(25.4,2.54) 23(27.94,0) 24(27.94,2.54) 25(30.48,0) 26(30.48,2.54) 27(33.02,0) 28(33.02,2.54) 29(35.56,0) 30(35.56,2.54)
  silkscreen extent -2.01,-1.27 36.83,3.81, body extent -1.27,-1.27 36.83,3.81, height 8.64
HDR_17x2_2R54_V_F [mm] "Female Header, Pitch 2.54mm, 2x17 Position, Mated Height 6mm, Tail Length 3mm"
  rect 1.5x1.8 hole 1.02: 1(0,0)
  oval 1.5x1.8 hole 1.02: 2(0,2.54) 3(2.54,0) 4(2.54,2.54) 5(5.08,0) 6(5.08,2.54) 7(7.62,0) 8(7.62,2.54) 9(10.16,0) 10(10.16,2.54) 11(12.7,0) 12(12.7,2.54) 13(15.24,0) 14(15.24,2.54) 15(17.78,0) 16(17.78,2.54) 17(20.32,0) 18(20.32,2.54) 19(22.86,0) 20(22.86,2.54) 21(25.4,0) 22(25.4,2.54) 23(27.94,0) 24(27.94,2.54) 25(30.48,0) 26(30.48,2.54) 27(33.02,0) 28(33.02,2.54) 29(35.56,0) 30(35.56,2.54) 31(38.1,0) 32(38.1,2.54) 33(40.64,0) 34(40.64,2.54)
  silkscreen extent -1.98,-1.27 41.91,3.81, body extent -1.27,-1.27 41.91,3.81, height 8.64
HSMF-A201 [mm] "LED"
  rect 1.5x1.1 smd: 1(-1.5,0.75) 2(1.5,0.75) 3(1.5,-0.75) 4(-1.5,-0.75)
  silkscreen extent -2.89,-1.55 1.75,1.55, body extent -1.6,-1.4 1.6,1.4, height 1.2
LQFP48_0R5_7x7 [mm] "Low & medium-density value line, advanced ARM-based 32-bit MCU"
  rect 0.2x1 smd: 1(-2.75,-4.25) 2(-2.25,-4.25) 3(-1.75,-4.25) 4(-1.25,-4.25) 5(-0.75,-4.25) 6(-0.25,-4.25) 7(0.25,-4.25) 8(0.75,-4.25) 9(1.25,-4.25) 10(1.75,-4.25) 11(2.25,-4.25) 12(2.75,-4.25) 25(2.75,4.25) 26(2.25,4.25) 27(1.75,4.25) 28(1.25,4.25) 29(0.75,4.25) 30(0.25,4.25) 31(-0.25,4.25) 32(-0.75,4.25) 33(-1.25,4.25) 34(-1.75,4.25) 35(-2.25,4.25) 36(-2.75,4.25)
  rect 1x0.2 smd: 13(4.25,-2.75) 14(4.25,-2.25) 15(4.25,-1.75) 16(4.25,-1.25) 17(4.25,-0.75) 18(4.25,-0.25) 19(4.25,0.25) 20(4.25,0.75) 21(4.25,1.25) 22(4.25,1.75) 23(4.25,2.25) 24(4.25,2.75) 37(-4.25,2.75) 38(-4.25,2.25) 39(-4.25,1.75) 40(-4.25,1.25) 41(-4.25,0.75) 42(-4.25,0.25) 43(-4.25,-0.25) 44(-4.25,-0.75) 45(-4.25,-1.25) 46(-4.25,-1.75) 47(-4.25,-2.25) 48(-4.25,-2.75)
  silkscreen extent -3.81,-5.52 3.81,3.81, body extent -3.5,-3.5 3.5,3.5, height 1.6
LQFP144_0R5_SKT [mm] "32-bit MCU ARM-based Cortex-M3 20 X 20mm, 0.5mm Pitch, 1.6mm Max thickness"
  rect 1x2.5 smd rot 45: 0(-10.96,-10.96) 0(10.96,10.96)
  rect 1x2.5 smd rot 135: 0(-10.96,10.96) 0(10.96,-10.96)
  round 1.5 hole 1.5 unplated: 0(0,-8) 0(0,8)
  rect 0.3x1.65 smd: 1(-8.75,-10.625) 2(-8.25,-10.625) 3(-7.75,-10.625) 4(-7.25,-10.625) 5(-6.75,-10.625) 6(-6.25,-10.625) 7(-5.75,-10.625) 8(-5.25,-10.625) 9(-4.75,-10.625) 10(-4.25,-10.625) 11(-3.75,-10.625) 12(-3.25,-10.625) 13(-2.75,-10.625) 14(-2.25,-10.625) 15(-1.75,-10.625) 16(-1.25,-10.625) 17(-0.75,-10.625) 18(-0.25,-10.625) 19(0.25,-10.625) 20(0.75,-10.625) 21(1.25,-10.625) 22(1.75,-10.625) 23(2.25,-10.625) 24(2.75,-10.625) 25(3.25,-10.625) 26(3.75,-10.625) 27(4.25,-10.625) 28(4.75,-10.625) 29(5.25,-10.625) 30(5.75,-10.625) 31(6.25,-10.625) 32(6.75,-10.625) 33(7.25,-10.625) 34(7.75,-10.625) 35(8.25,-10.625) 36(8.75,-10.625) 73(8.75,10.625) 74(8.25,10.625) 75(7.75,10.625) 76(7.25,10.625) 77(6.75,10.625) 78(6.25,10.625) 79(5.75,10.625) 80(5.25,10.625) 81(4.75,10.625) 82(4.25,10.625) 83(3.75,10.625) 84(3.25,10.625) 85(2.75,10.625) 86(2.25,10.625) 87(1.75,10.625) 88(1.25,10.625) 89(0.75,10.625) 90(0.25,10.625) 91(-0.25,10.625) 92(-0.75,10.625) 93(-1.25,10.625) 94(-1.75,10.625) 95(-2.25,10.625) 96(-2.75,10.625) 97(-3.25,10.625) 98(-3.75,10.625) 99(-4.25,10.625) 100(-4.75,10.625) 101(-5.25,10.625) 102(-5.75,10.625) 103(-6.25,10.625) 104(-6.75,10.625) 105(-7.25,10.625) 106(-7.75,10.625) 107(-8.25,10.625) 108(-8.75,10.625)
  rect 1.65x0.3 smd: 37(10.625,-8.75) 38(10.625,-8.25) 39(10.625,-7.75) 40(10.625,-7.25) 41(10.625,-6.75) 42(10.625,-6.25) 43(10.625,-5.75) 44(10.625,-5.25) 45(10.625,-4.75) 46(10.625,-4.25) 47(10.625,-3.75) 48(10.625,-3.25) 49(10.625,-2.75) 50(10.625,-2.25) 51(10.625,-1.75) 52(10.625,-1.25) 53(10.625,-0.75) 54(10.625,-0.25) 55(10.625,0.25) 56(10.625,0.75) 57(10.625,1.25) 58(10.625,1.75) 59(10.625,2.25) 60(10.625,2.75) 61(10.625,3.25) 62(10.625,3.75) 63(10.625,4.25) 64(10.625,4.75) 65(10.625,5.25) 66(10.625,5.75) 67(10.625,6.25) 68(10.625,6.75) 69(10.625,7.25) 70(10.625,7.75) 71(10.625,8.25) 72(10.625,8.75) 109(-10.625,8.75) 110(-10.625,8.25) 111(-10.625,7.75) 112(-10.625,7.25) 113(-10.625,6.75) 114(-10.625,6.25) 115(-10.625,5.75) 116(-10.625,5.25) 117(-10.625,4.75) 118(-10.625,4.25) 119(-10.625,3.75) 120(-10.625,3.25) 121(-10.625,2.75) 122(-10.625,2.25) 123(-10.625,1.75) 124(-10.625,1.25) 125(-10.625,0.75) 126(-10.625,0.25) 127(-10.625,-0.25) 128(-10.625,-0.75) 129(-10.625,-1.25) 130(-10.625,-1.75) 131(-10.625,-2.25) 132(-10.625,-2.75) 133(-10.625,-3.25) 134(-10.625,-3.75) 135(-10.625,-4.25) 136(-10.625,-4.75) 137(-10.625,-5.25) 138(-10.625,-5.75) 139(-10.625,-6.25) 140(-10.625,-6.75) 141(-10.625,-7.25) 142(-10.625,-7.75) 143(-10.625,-8.25) 144(-10.625,-8.75)
  silkscreen extent -10,-12.27 10,10, body extent -17.11,-17.11 17.11,17.12, height 14.3
MOLEX_47590001 [mm] "USB Micro-B Connector"
  rect 0.4x1.35 smd: 1(1.3,0) 2(0.65,0) 3(0,0) 4(-0.65,0) 5(-1.3,0)
  oval 1.05x1.25 hole 0.65 slot 0.85 at 90 deg: 6(-2.225,0.325) 10(2.225,0.325)
  rect 1.4x1.9 hole 0.6 slot 1.3 at 90 deg copper offset 0.2,0: 7(-4.2,-2.675)
  rect 2.9x1.9 smd: 8(0,-2.675)
  rect 1.4x1.9 hole 0.6 slot 1.3 at 90 deg copper offset -0.2,0: 9(4.2,-2.675)
  silkscreen extent -4.95,-1.46 4.95,1.25, body extent -4.4,-5.29 4.4,0.44, height 2.71
Molex_1050170001 [mm] "USB Micro-B Connector"
  rect 0.4x1.35 smd: 1(-1.3,0) 2(-0.65,0) 3(0,0) 4(0.65,0) 5(1.3,0)
  round 1.45 hole 0.85: 6(-2.5,0) 11(2.5,0)
  rect 1.8x1.9 hole 0.6 slot 1.3 at 90 deg copper offset 0.3,0: 7(-3.5,-2.7)
  rect 1.5x1.9 smd: 8(-1,-2.7) 9(1,-2.7)
  rect 1.8x1.9 hole 0.6 slot 1.3 at 90 deg copper offset -0.3,0: 10(3.5,-2.7)
  silkscreen extent -3.95,-1.46 3.95,1.37, body extent -4.1,-5.21 4.1,0.19, height 2.58
OSC_2SM_3R2x2R5 [mm] "Crystal 8M Hz 3.2x2.5mm SMD"
  rect 1.5x2.7 smd: 1(-0.95,0) 2(0.95,0)
  body extent -1.6,-1.25 1.6,1.25, height 1
PB-6X6mm-Black [mm] "Surface Mounting Type Tact Switch, 4-Leads, Body 6x6mm, Height 4.5mm Black"
  rect 2.3x1.8 smd: 1(4.325,2.25) 2(4.325,-2.25) 3(-4.325,-2.25) 4(-4.325,2.25)
  silkscreen extent -2.83,-3 2.81,3, body extent -3,-3 3,3, height 10.5
PB-6X6mm-Blue [mm] "Surface Mounting Type Tact Switch, 4-Leads, Body 6x6mm, Height 4.5mm,Blue"
  rect 2.3x1.8 smd: 1(4.325,2.25) 2(4.325,-2.25) 3(-4.325,-2.25) 4(-4.325,2.25)
  silkscreen extent -2.83,-3 2.81,3, body extent -3,-3 3,3, height 10.5
QFN24_0R5_4X4 [mm] "SQFN 24 Pins, Pitch 0.5mm, 4mmx4mm"
  rect 0.69x0.28 smd: 1(-1.9,1.25) 2(-1.9,0.75) 3(-1.9,0.25) 4(-1.9,-0.25) 5(-1.9,-0.75) 6(-1.9,-1.25) 13(1.9,-1.25) 14(1.9,-0.75) 15(1.9,-0.25) 16(1.9,0.25) 17(1.9,0.75) 18(1.9,1.25)
  rect 0.28x0.69 smd: 7(-1.25,-1.9) 8(-0.75,-1.9) 9(-0.25,-1.9) 10(0.25,-1.9) 11(0.75,-1.9) 12(1.25,-1.9) 19(1.25,1.9) 20(0.75,1.9) 21(0.25,1.9) 22(-0.25,1.9) 23(-0.75,1.9) 24(-1.25,1.9)
  rect 2.5x2.5 smd: 25(0,0)
  silkscreen extent -2.46,-2.05 2.05,2.05, body extent -2.05,-2.05 2.05,2.05, height 1
RJ45_KRJ-CB4.2GYZNL [mm] "RJ45  connector, right angle"
  rect 1x1 hole 0.7: 1(3.57,2.65)
  round 1 hole 0.7: 2(2.55,3.75) 3(1.53,2.65) 4(0.51,3.75) 5(-0.51,2.65) 6(-1.53,3.75) 7(-2.55,2.65) 8(-3.57,3.75) 9(7.06,1.57) 10(4.77,1.57) 11(-4.77,1.57) 12(-7.06,1.57)
  oval 1x2.6 hole 0.7 slot 2.2 at 90 deg: 13(8.04,-3.75) 14(-8.04,-3.75)
  body extent -8.1,-11.75 8.08,3.47, height 6.8
SB_0603 [mil] "Jumper"
  rect 32x40 smd: 1(33.75,0) 2(-33.75,0)
  Top Layer region: 23.75,20 13.75,20 -6.25,0 13.75,-20 23.75,-20
  Top Layer region: -26.25,0 -16.25,0 3.75,20 -26.25,20
  Top Layer region: -26.25,0 -16.25,0 3.75,-20 -26.25,-20
SOD-323 [mm] "Diode"
  rect 1.35x0.4 smd: 1(-1.2,0) 2(1.2,0)
  silkscreen extent -1.4,-0.75 1.4,1.24, body extent -1.35,-0.72 1.35,0.72, height 1.17
SOIC8_1R27_4R9X6 [mm] "1.2 A current limited high-side power switch with thermal shutdown"
  rect 2.2x0.6 smd: 1(-2.425,1.905) 2(-2.425,0.635) 3(-2.425,-0.635) 4(-2.425,-1.905) 5(2.425,-1.905) 6(2.425,-0.635) 7(2.425,0.635) 8(2.425,1.905)
  silkscreen extent -2.67,-2.5 0.93,3.08, body extent -2,-2.5 2,2.5, height 1.45
SOT23-6L [mm]
  rect 1.1x0.6 smd: 1(-1.2,0.95) 2(-1.2,0) 3(-1.2,-0.95) 4(1.2,-0.95) 5(1.2,0) 6(1.2,0.95)
  silkscreen extent -1.32,-1.5 0.25,1.92, body extent -0.86,-1.51 0.87,1.52, height 1.25
SOT-23 [mm]
  rect 0.8x0.9 smd: 1(-0.98,-1) 2(0.98,-1) 3(0,1)
  silkscreen extent -2,-1.52 1.5,0.7, body extent -1.52,-0.7 1.52,0.7, height 1.11
SOT-23-5L [mil] "Enhanced single channel power switches"
  rect 30x16 smd: 1(-53.15,37.4) 2(-53.15,0) 3(-53.15,-37.4) 4(53.15,-37.4) 5(53.15,37.4)
  silkscreen extent -33,-58 32,57, body extent -34,-59 34,59, height 57
SOT-223 [mil] "Adjustable and fixed low drop positive voltage regulator"
  rect 80x40 smd: 1(-125,93) 2(-125,0) 3(-125,-93)
  rect 90x120 smd: 4(125,0)
  silkscreen extent -62,-149 48,141, body extent -84,-132 62,132, height 71
TAN-A [mil] "TAN Capacitor"
  rect 50x60 smd: 1(55,0) 2(-55,0)
  silkscreen extent -95,-45 95,80, body extent -47,-35 47,35, height 39
TAN-B [mm] "Tan Capacitor"
  rect 1.5x2.8 smd: 1(1.55,0) 2(-1.55,0)
  silkscreen extent -2.79,-1.9 3.56,1.91, body extent -1.76,-1.54 1.7,1.54, height 1
TP [mm] "Testpoint, Surface Mounting, Circular, Pad Diameter 1mm"
  round 1 smd: 1(0,0)
Transformer [mm]
  rect 0.64x1.4 smd: 1(-4.445,-4.51) 2(-3.175,-4.51) 3(-1.905,-4.51) 4(-0.635,-4.51) 5(0.635,-4.51) 6(1.905,-4.51) 7(3.175,-4.51) 8(4.445,-4.51) 9(4.445,4.51) 10(3.175,4.51) 11(1.905,4.51) 12(0.635,4.51) 13(-0.635,4.51) 14(-1.905,4.51) 15(-3.175,4.51) 16(-4.445,4.51)
  silkscreen extent -4.57,-6.09 -4.32,-5.84, body extent -6.4,-3 6.4,3, height 6
XTAL_2SM_3R2X1R5 [mm] "CRYSTAL 32.768KHZ 6PF SMD 2 pads"
  rect 1x1.8 smd: 1(-1.25,0) 2(1.25,0)
  silkscreen extent -0.28,-0.91 0.28,0.91, body extent -1.63,-0.75 1.58,0.75, height 0.89
XTAL_2SM_5R0X3R2 [mm] "CRYSTAL 25M Hz  30F SMD 2 pads"
  rect 1.8x2.2 smd: 1(-1.9,0) 2(1.9,0)
  silkscreen extent -0.4,-1.27 0.4,1.27, body extent -2.5,-1.6 2.5,1.6, height 1.3

## Part data
B1 B2: library part "SW PUSHBUTTON", "SE PUSHBUTTON"
C1 C2 C3 C4 C5 C6 C7 C8 C10 C11 C12 C13 C19 C20 C22 C40 C42 C43 C44 C45 C47 C48 C49 C50: library part Capacitor_ST, "Capacitor 0402 / 0603 / 0805"
C9 C14 C23: library part "CAP SMD 0603  X5R 1µF 25V 10%", "0603  X5R 1µ"
C15: library part "CAP SMD 0603  X7R 10000PF 50V 10%", "0603  X7R 10NF"
C16 C54: library part "Cap Pol1", "Polarized Capacitor (Radial)"
C17 C18 C41 C57: library part "CAP SMD 0603  X5R 1µF 25V 10%", "0603  X5R 1µF"
C21: library part "CAP SMD 0603  X5R 1µF 25V 10%", "0603  X5R 4.7uF"
C24 C25 C26 C27 C28 C29 C30 C31 C32 C33 C34 C39 C58: library part Cap, "Capacitor"
C35 C36 C37 C38 C52 C53: library part CAP, "Capacitor"
C46: library part Cap_10uF_POL_10%_TANA, "Polarized Capacitor,10uF,10V,10%,typeA,VISHAY"
C51: library part Capacitor_ST, "Capacitor 0402 / 0603 / 0805/ 1206"
C55 C56: library part Cap_2.2uF_X7R_10%_0805, "Capacitor,2.2uF,16V, X7R,10%,0805,YAGEO"
CN2 CN3 CN5 JP1 JP2 JP4 JP5 JP6 JP7: library part JP2
CN4: "Header, 4-Pin, Single row"
CN6: "Header, 6-Pin, Single row"
CN7: "Header, 10-Pin, Dual row,female"
CN8: "Header, 8-Pin, Dual row,female"
CN9: "Header, 15-Pin, Dual row,female"
CN10: "Header, 17-Pin, Dual row,female"
CN11 CN12: "Header, 36-Pin, Dual row"
CN14: "100 Base-TX (Fast Ethernet) SMD RJ45 single port (1x1) with LEDS Integrated Magnetics Connector"
D2: library part Diode, "Default Diode"
D6: "4-line ESD protection"
JP3: "Header, 3-Pin, Dual row"
L1 L2: library part Inductor, "Inductor"
LD1 LD2 LD3 LD4 LD5 LD6 LD7 LD8: library part LED2, "Typical RED, GREEN, YELLOW, AMBER GaAs LED"
R1 R2 R3 R4 R10 R11 R13 R14 R15 R17 R19 R20 R21 R22 R23 R24 R25 R26 R27 R28 R29 R35 R39 R41 R43 R44 R47 R62 R63 R65 R66 R67: library part Resistor_ST, "Resistor 0402 / 0603 / 0805"
R5 R6 R9 R33 R34 R36 R58 R64 R68 R69 R71: library part res1, "Resistor"
R7 R8 R12 R16 R18 R30 R31 R32 R37 R38 R59 R60 R61 R70 R72 R73: library part Res1, "Resistor"
R40 R42 R45 R48: library part Res_33_1%_0402, "Resistor,33,0402,1%,YAGEO"
R46: library part Res_1K5_1%_0402, "Resistor,1K5,0402,1%,YAGEO"
R49: library part Res_12K1_1%_0603, "Resistor,12K1,0603,1%,VISHAY"
R50 R51 R52 R53: library part Res_50_1%_0603, "Resistor,50,0603,1%,YAGEO"
R54 R55 R56 R57: library part Res_75_1%_0603, "Resistor,75,0603,1%,YAGEO"
SB1 SB8 SB9 SB16 SB17 SB102 SB104 SB106 SB107 SB109 SB113 SB119 SB122 SB138 SB142 SB143 SB144 SB145 SB148 SB152 SB180: library part "Circuit Breaker", "Circuit Breaker"
SB2 SB3 SB4 SB5 SB6 SB7 SB12 SB13 SB101 SB103 SB105 SB108 SB110 SB111 SB112 SB114 SB116 SB117 SB118 SB120 SB121 SB132 SB133 SB139 SB149 SB155 SB156 SB160 SB162 SB163 SB164 SB173 SB177 SB178 SB179 SB181 SB182 SB183 SB184 SB185 SB186 SB187: library part "Circuit Breaker_close", "Circuit Breaker"
T1 T2: library part NPN, "NPN Bipolar Transistor"
TP1: library part TP
U2: "Medium-density performance line ARM-based 32-bit MCU with 64KB Flash"
U3: library part CMP-0378-00057-1, "4 Mbit SPI Serial Flash, 2.7 to 3.6 V, 50 MHz, -40 to 85 degC, 8-pin SOIC (S2A8), Tube"
U5 U6: library part LD39050P
U9: "LAN8742A-CZ-TR - Small Footprint RMII 10/100 Ethernet, Transceiver with HP Auto-MDIX and flexPWR Technology SQFN-24"
U12: library part STMPS2141STR
X1 X3: library part XTAL, "Crystal Oscillator"
X2: library part CRYSTAL_32K, "Crystal"
X4: library part XTAL_5032, "Crystal Oscillator"

## Free pads (board coordinates)
  round 3.2 hole 3.2 unplated: 0(0,49.53) 0(1.27,-26.67) 0(33.02,-2.54) 0(46.99,-26.67) 0(48.26,48.26)

## Via types
v1: diameter 0.406, hole 0.203, Top Layer to Bottom Layer, tented both sides, 464 vias
v2: diameter 0.381, hole 0.203, Top Layer to Bottom Layer, tented both sides, 415 vias
v3: diameter 0.508, hole 0.305, Top Layer to Bottom Layer, tented both sides, 39 vias
v4: diameter 0.66, hole 0.33, Top Layer to Bottom Layer, tented both sides, 2 vias
v5: diameter 0.381, hole 0.203, Top Layer to Bottom Layer, 1 vias

## Nets (pads, with @x,y where several pads share a name; then routed paths per layer and width w, separated by ;. In a path a pad name is that pad's centre, name@x,y a point inside that pad or via, vN(x,y) a via of type N, cw(c..) or ccw(c..) an arc to the next point about the centre after c; other vN are vias at no path point)
+3V3: CN8.7 CN11.16 JP5.1 SB2.1 SB3.2 SB114.1 | length 17.3
  Top Layer w1.016: JP5.1@25.4,38.1 26.765,39.465 SB2.1@28.981,39.465 SB3.2@30.455,39.465 ; SB3.2@30.48,39.44 v3@30.48,44.873
  Bottom Layer w0.508: CN11.16@-5.08,27.94 CN8.7@0,27.94 ; v3(0.711,37.49) 0.73,37.49 0.832,37.592 SB114.1@0.832,38.557
  other v3: 30.525,43.332 30.525,44.125 30.525,44.919
+3V3_PER: C40.2 L2.2 R25.1 R39.1 R43.1 R44.1 R46.2 R47.1 R61.2 R64.2 R71.1 SB2.2 SB113.1 U7.5 U9.9 | length 112.7
  Top Layer w0.254: R61.2@7.899,-43.726 7.899,-42.596 8.164,-42.332 9.413,-42.332 v1(9.449,-42.367) ; v2@11.303,-23.8 v2(11.328,-23.774) L2.2@16.37,-23.774 L2.2@16.243,-23.901 ; v2(16.612,56.812) R25.1@16.612,57.739 ; v2(17.678,-10.554) R39.1@18.694,-10.554 ; v1@17.704,-13.919 R46.2@18.631,-13.919 R47.1@18.631,-15.418 ; v2(19.875,-42.57) 19.888,-42.583 R64.2@19.888,-43.447 ; v2(21.387,-47.803) 21.4,-47.816 R71.1@22.504,-47.816 ; C40.2@23.216,-11.925 C40.2@23.216,-12.154 23.216,-12.84 23.558,-13.183 v1(23.901,-13.183) 24.38,-13.661 U9.9@24.38,-15.228 ; R43.1@26.213,-10.554 v2(26.213,-9.398) ; R44.1@27.711,-10.554 v2(27.711,-9.398) ; SB2.2@28.95,37.783 SB2.2@28.981,37.751 ; U7.5@38.661,39.602 v1(38.661,40.513)
  Top Layer w0.508: v3(28.016,37.744) 28.975,37.744 SB2.2@28.981,37.751
  Signal w0.254: v3(8.611,49.492) 8.395,49.492 6.985,50.902 6.985,53.364 7.875,54.254 15.786,54.254 16.612,55.08 v2@16.612,56.769 ; v1(9.449,-42.367) 10.947,-40.869 18.174,-40.869 v2(19.875,-42.57) 21.387,-44.082 v2(21.387,-47.803)
  Signal w0.508: v3(8.611,49.492) 24.949,49.492 28.016,46.425 v3(28.016,37.744)
  Bottom Layer w0.254: v3(28.016,37.744) 30.785,40.513 v1(38.661,40.513)
  Bottom Layer w0.508: SB113.1@0.832,40.056 0.832,45.028 5.296,49.492 v3(8.611,49.492)
  other v1: 17.767,-13.932
+3V3_ST_LINK: C1.2 C3.2 C8.2 C9.1 C12.2 C13.2 JP1.1 R5.2 R14.2 R18.1 SB102.2 T1.3 U2.1 U2.9 U2.24 U2.36 U2.48 U3.5 | length 22.3
  Top Layer w0.203: U2.9@19.88,60.98 20.483,60.98 20.803,60.66 v1(20.803,58.039) ; v1(19.914,66.479) 19.915,66.48 U2.48@21.38,66.48
  Top Layer w0.254: R18.1@-7.62,63.03 v2(-7.62,63.957) ; U2.1@19.914,65.012 v1(19.914,66.479) C1.2@19.914,68.185 ; R5.2@21.387,69.786 v2(21.387,70.714) ; v2(21.679,56.274) C12.2@22.606,56.274 ; v2(25.946,56.274) C13.2@26.873,56.274 ; C13.2@26.88,56.279 U2.24@26.88,57.98 ; U2.36@28.38,64.98 30.689,64.98 C3.2@30.696,64.973 v1@29.725,64.973 ; T1.3@44.094,70.367 v2(44.094,71.295) ; v2(51.537,64.338) R14.2@51.537,65.265
  Bottom Layer w0.254: SB102.2@11.627,73.66 v1(12.63,73.659) ; v1(20.803,58.039) 20.796,58.032 20.796,56.585 21.107,56.274 v2@21.646,56.274
  other v1: 25.781,61.796 37.973,62.357 40.208,62.357 -0.686,64.337 29.566,64.973 -0.686,67.055
  other v3: 45.593,60.858 46.533,60.858 45.593,61.544 46.533,61.544
+5V: C22.2 C23.1 CN8.9 CN11.18 D2.1 JP3.1 JP3.3 JP3.5 R29.2 U6.1 U6.6 U12.5 | length 61.6
  Top Layer w0.254: v2(18.989,-47.74) U12.5@18.989,-46.707 ; D2.1@29.134,68.345 v1@30.115,68.345 ; v2(41.859,48.057) R29.2@41.859,49.035
  Top Layer w0.508: C22.2@35.458,35.496 C23.1@36.957,35.496 U6.6@36.957,36.886 ; JP3.1@35.56,41.91 36.932,41.91 ; U6.6@36.942,36.902 37.486,36.902 37.643,37.059 37.643,39.243 37.384,39.502 U6.1@36.942,39.502 36.942,41.9 36.932,41.91 ; JP3.5@40.64,41.91 JP3.3@38.1,41.91 36.932,41.91
  Signal w0.254: v2@14.707,-52.299 14.732,-52.273 17.42,-52.273 18.989,-50.704 v2(18.989,-47.74)
  Bottom Layer w0.254: v1(30.134,68.364) 30.134,65.954 30.912,65.176 38.96,65.176 41.275,62.862 41.275,54.077 41.859,53.492 v2(41.859,48.057) 41.859,43.129 JP3.5@40.64,41.91
  other v2: 14.707,-52.273